# EAGLE board BeagleBone_Blue (EAGLE 7.3.0), part 1 of 3
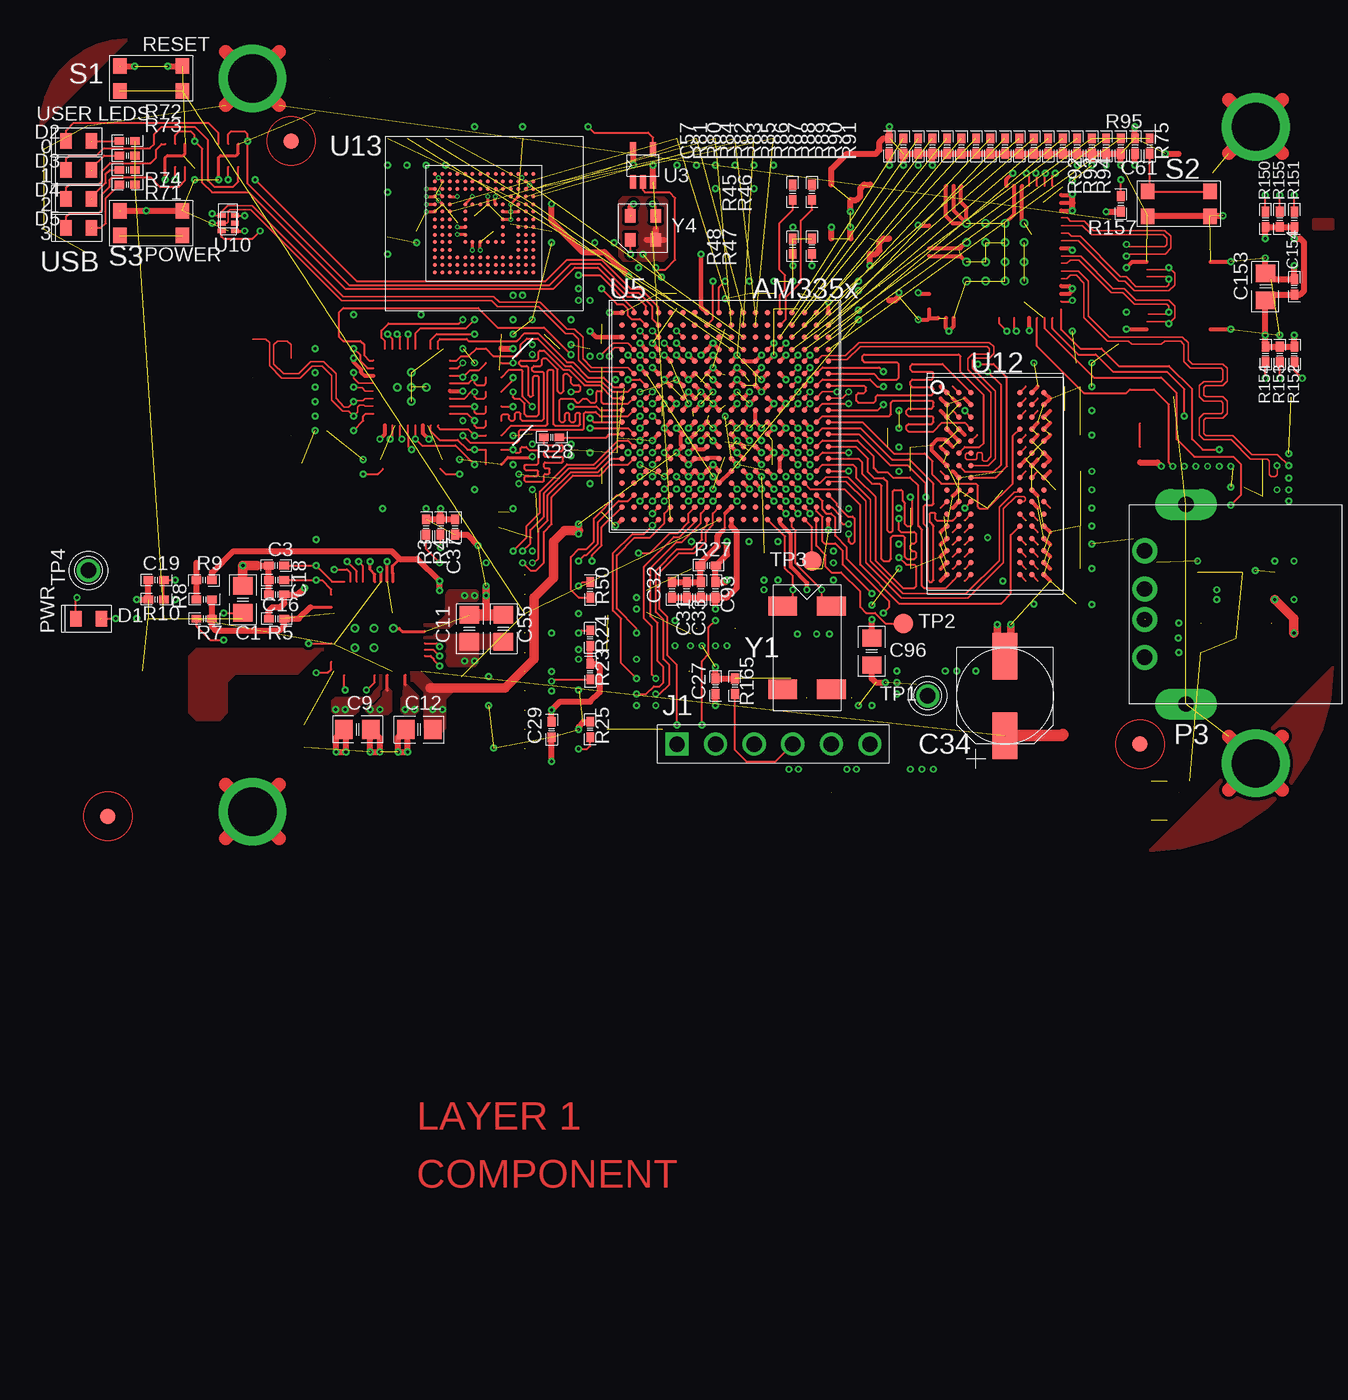
[diagram p0: board, top side]
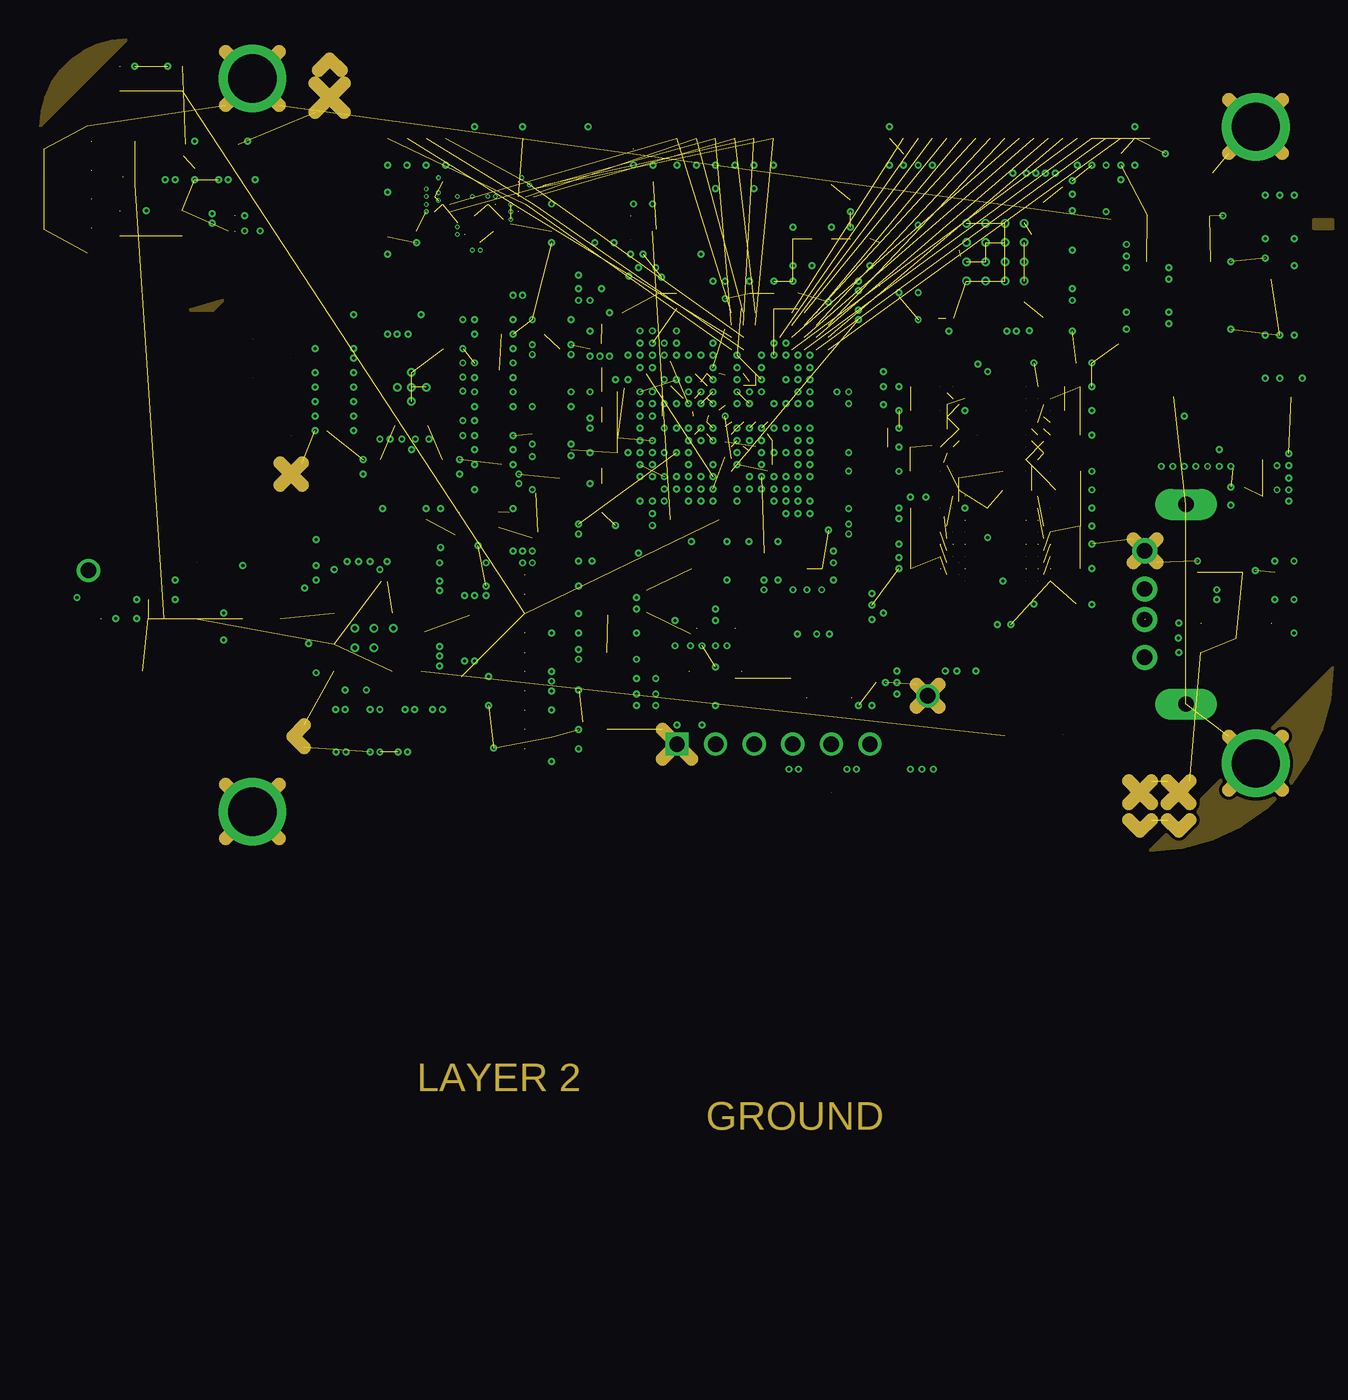
[diagram p1: board, inner layer Route2]
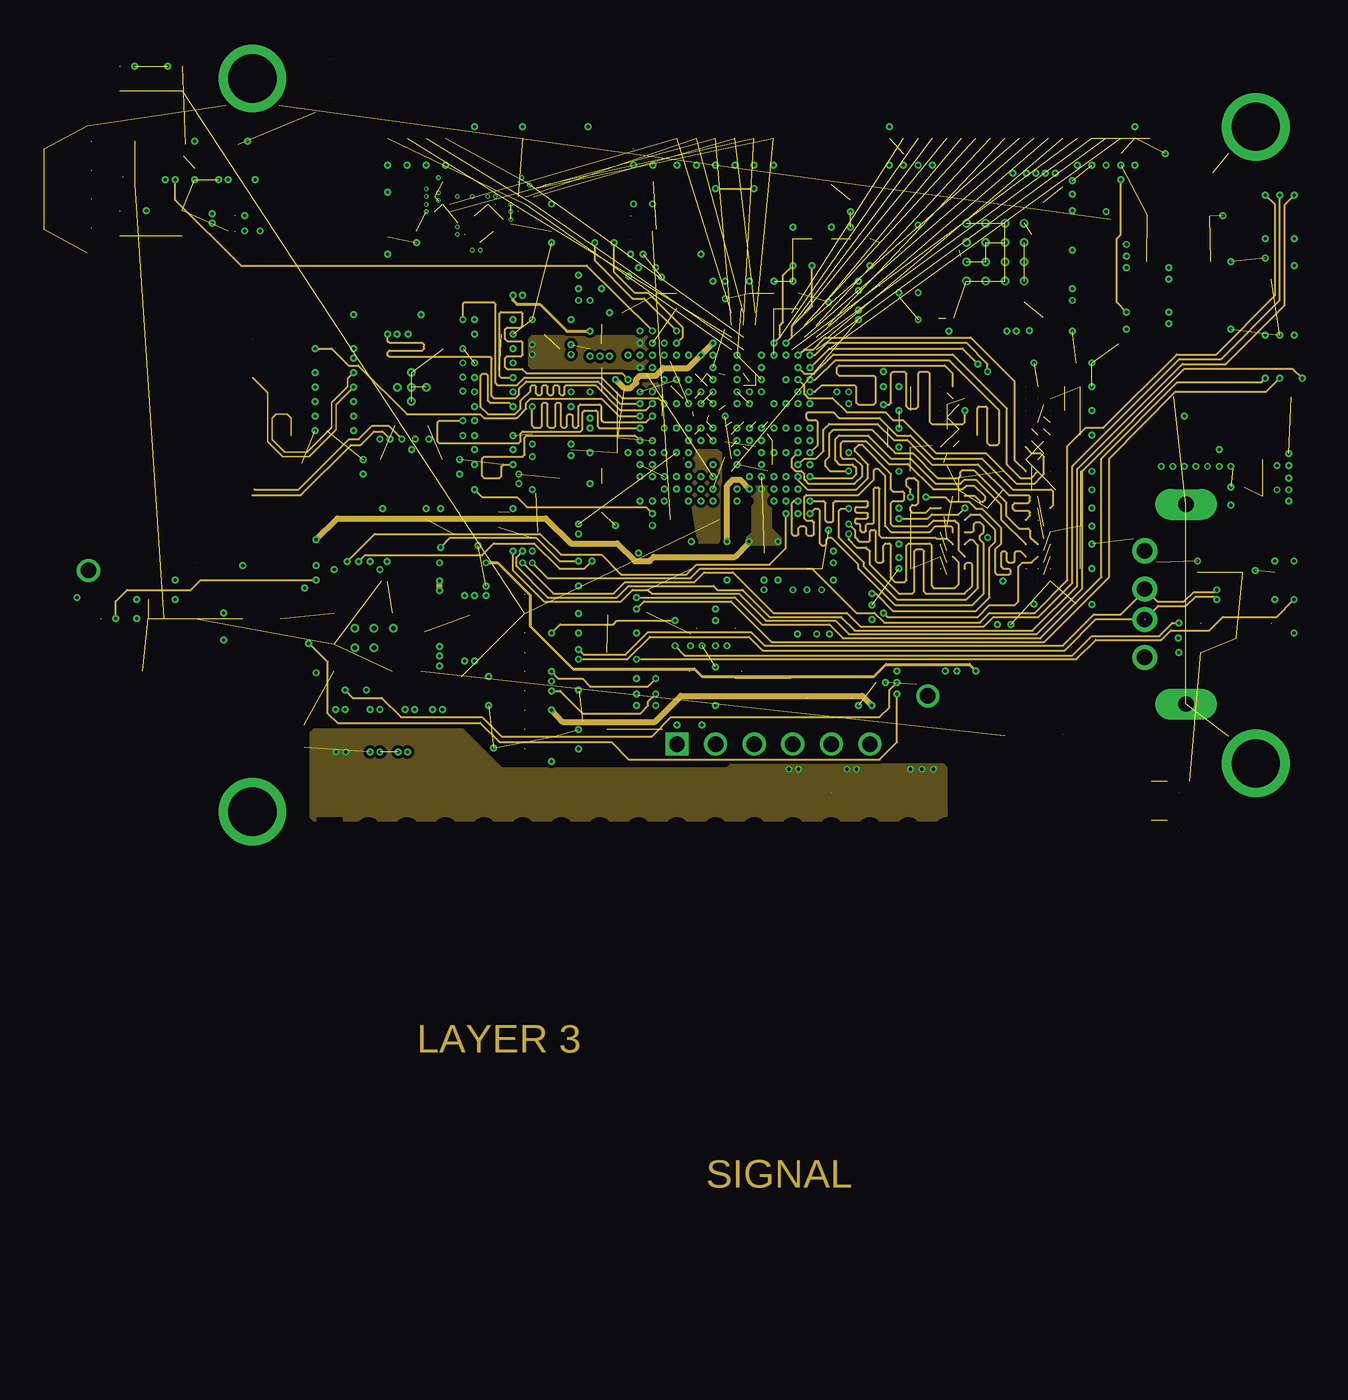
[diagram p2: board, inner layer Route3]
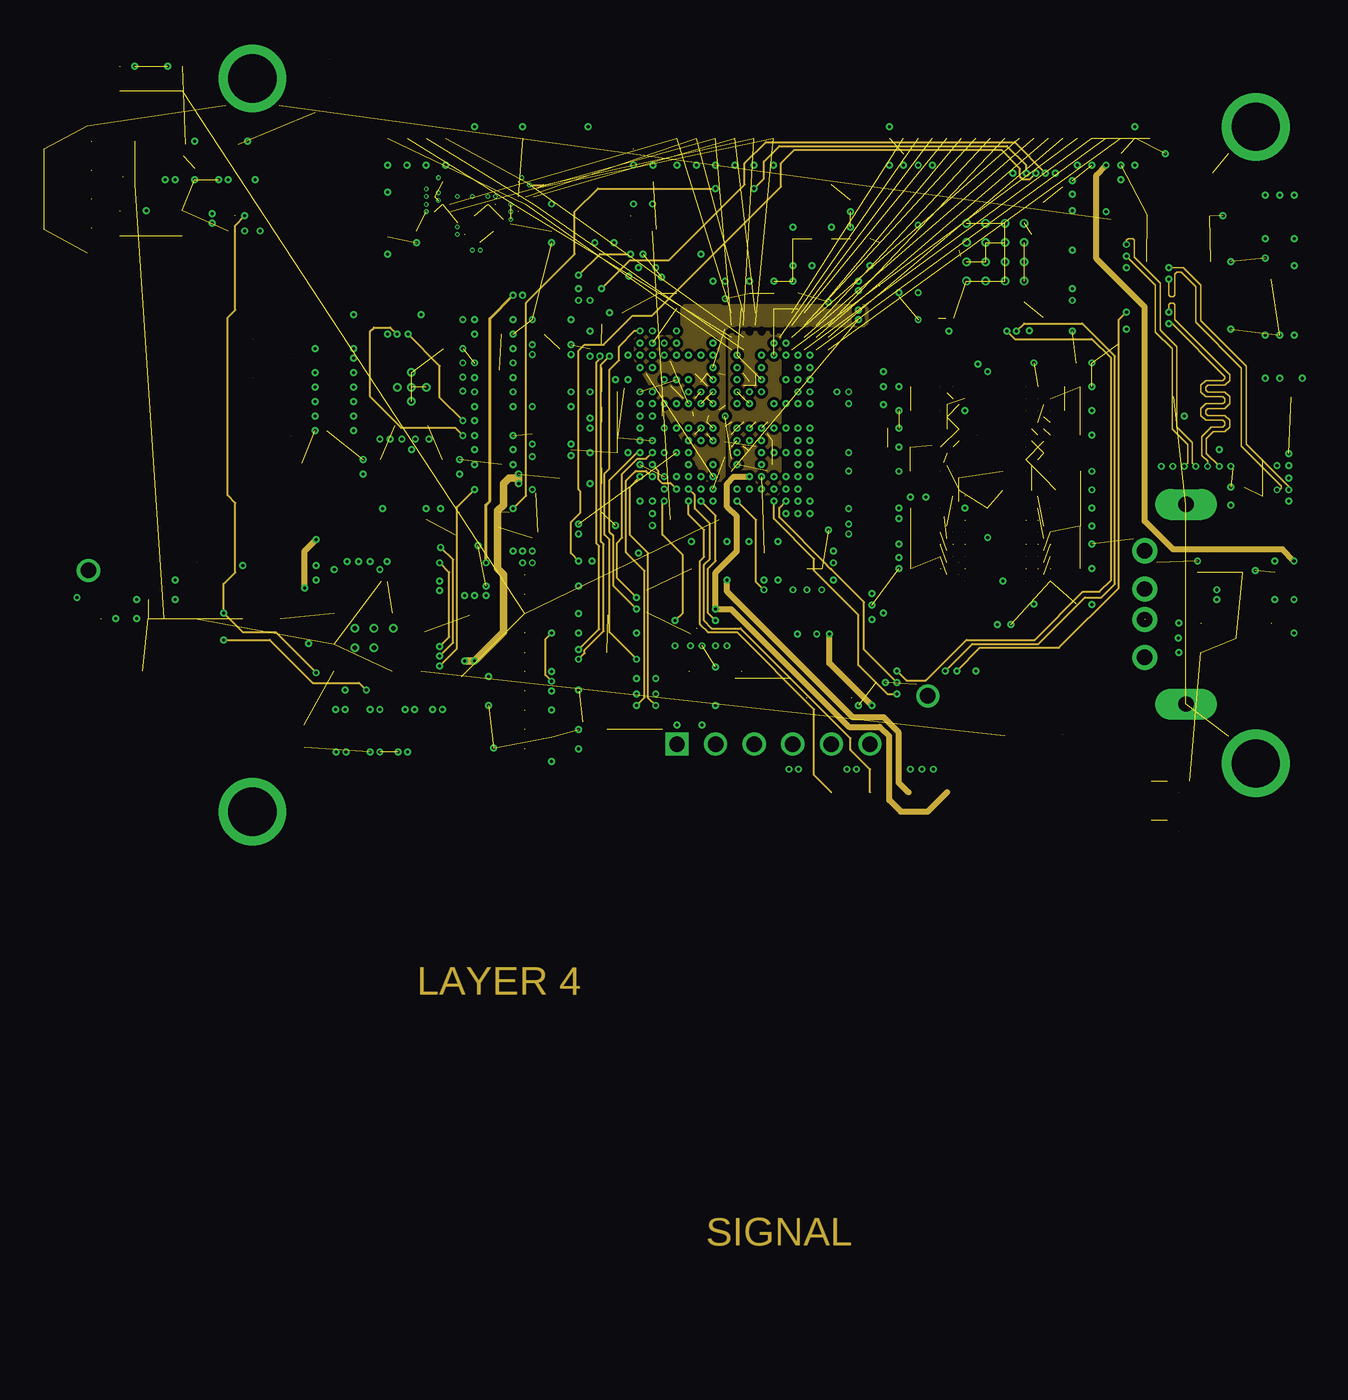
[diagram p3: board, inner layer Route4]
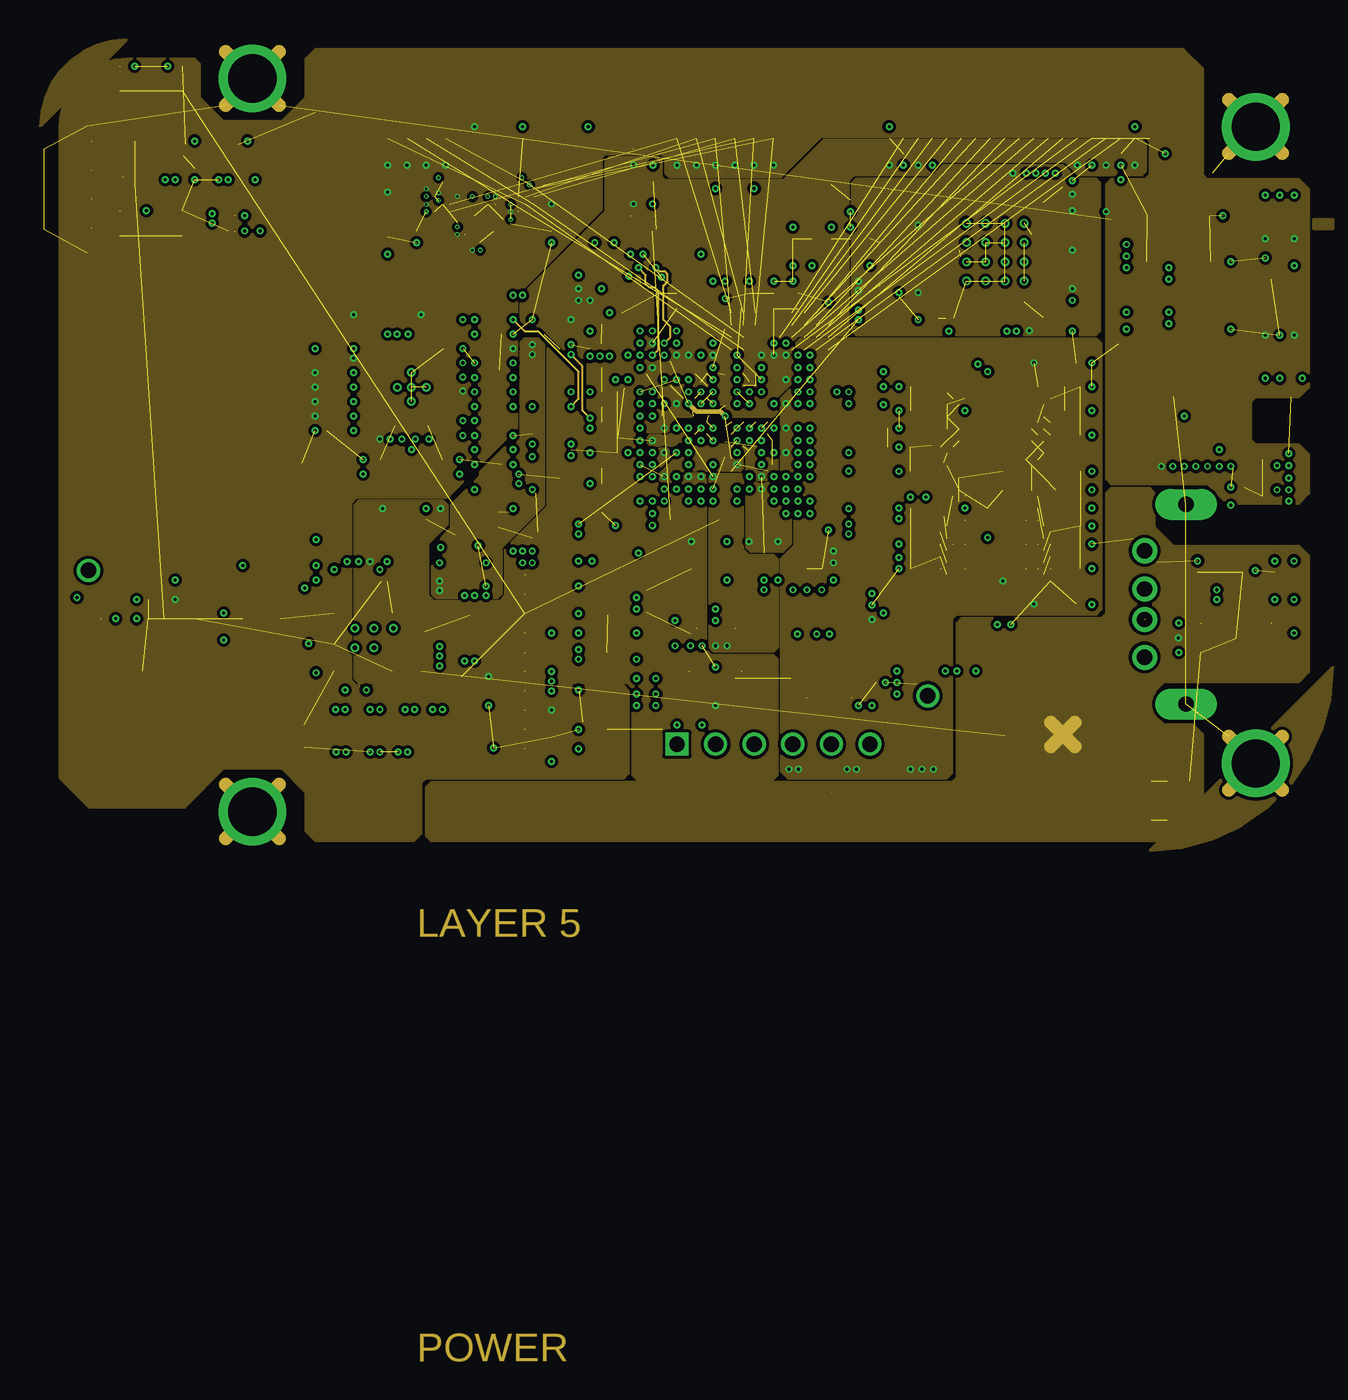
[diagram p4: board, inner layer Route5]
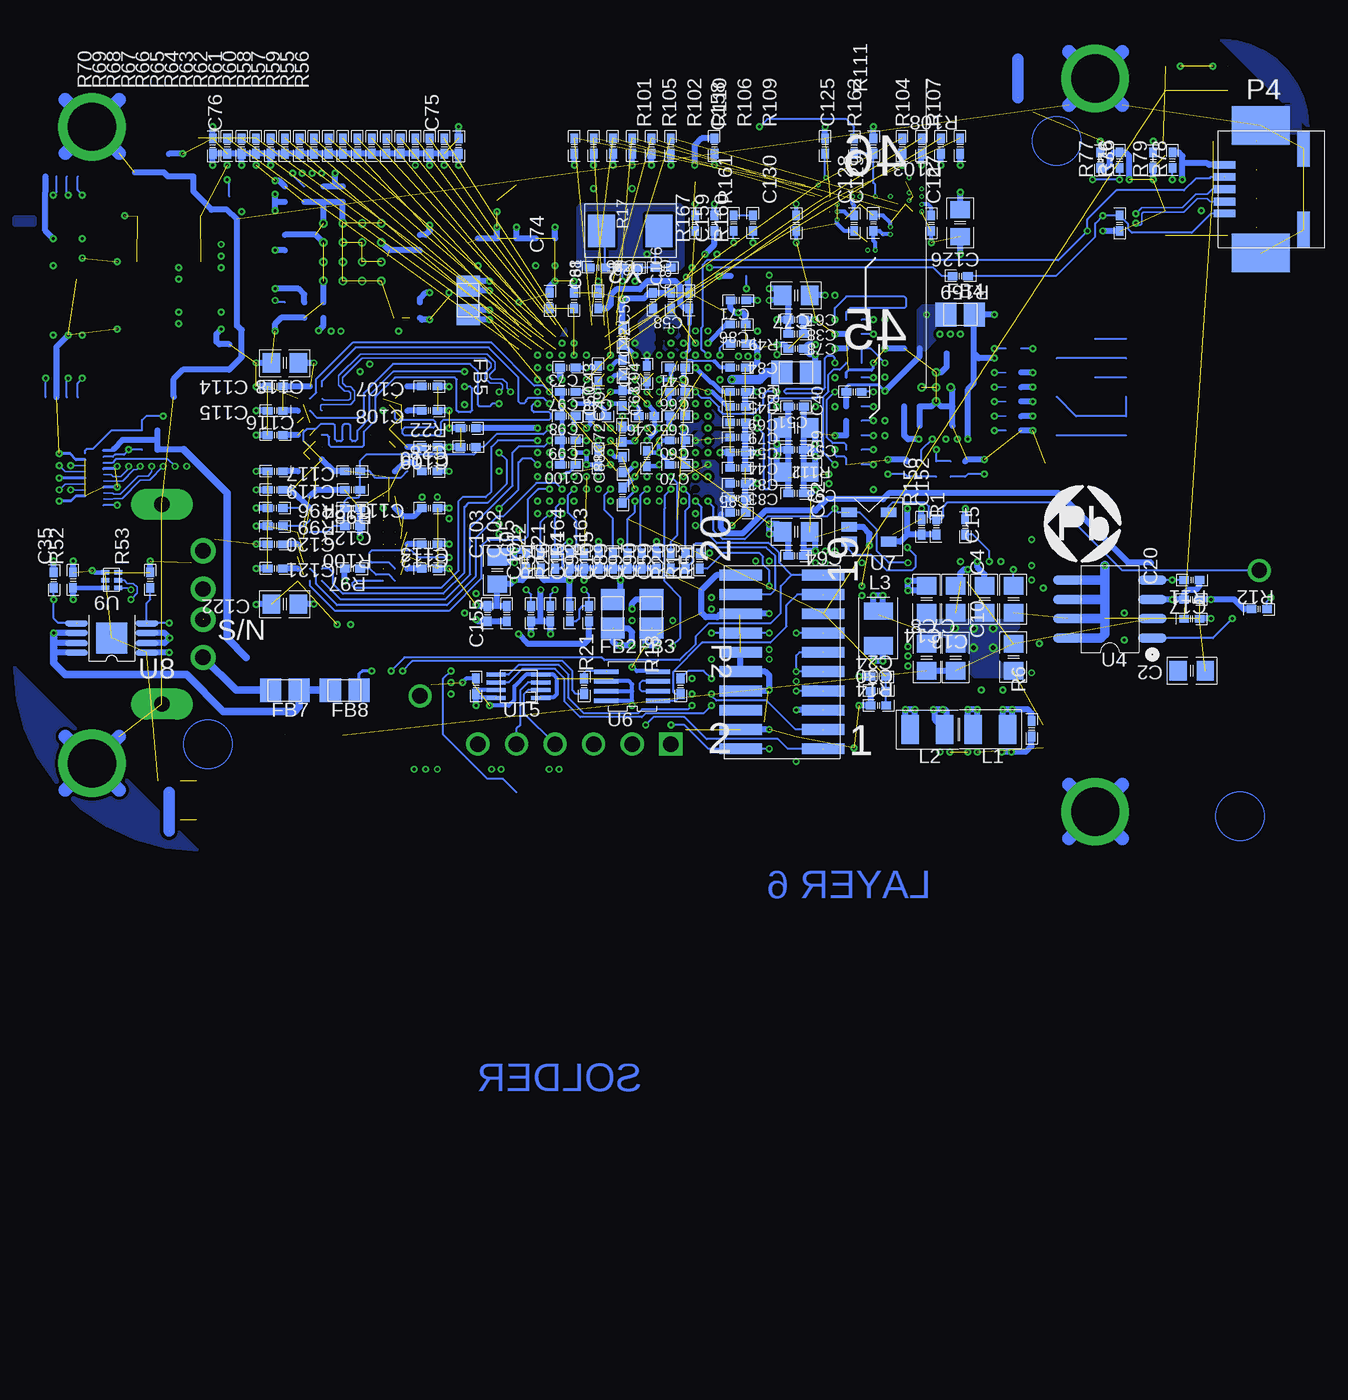
[diagram p5: board, bottom side, seen from below]

No outline drawn. Coordinates in mm, seen from the top.
Copper layers (1*16): Top 0.035mm / dielectric 1.5mm / Bottom 0.035mm
Design rules "BeagleBone_Black_RevB4": minimum track width 10mil, minimum drill 24mil, track to track 8mil, track to pad 8mil, pad to pad 8mil, via to via 8mil, smd to smd 8mil, copper to edge 40mil, drill to drill 8mil, minimum pad ring 0mil, minimum via ring 0mil, stop-mask expansion 4mil, vias tented up to drill 0mil, thermal gap 10mil

## Footprints (pad centres in the part's own frame; a part is rotated, then mirrored left to right if it is on the bottom)
805_1PRIMARY = smd 1.143 x 1.27: 1 -0.889,0; 2 0.889,0
402_2PRIMARY = smd 0.635 x 0.508: 1 -0.508,0; 2 0.508,0
805_2PRIMARY = smd 1.143 x 1.27: 1 -0.889,0; 2 0.889,0
402_1PRIMARY = smd 0.635 x 0.508: 1 -0.508,0; 2 0.508,0
RD205SMD_250D_1PRIMARY = smd 3.048 x 1.651: 1 -2.616,0; 2 2.616,0
LED_0603_1PRIMARY = smd 0.762 x 1.016: 1 -0.838,0; 2 0.838,0
P:EX40Y40D01 = smd 1.016 x 1.016: 0 0,0
SM-7351-IND-0805_1PRIMARY = smd 1.397 x 1.549: 1 0.94,0; 2 -0.94,0
SIP6_1PRIMARY = drill 1.016 pad 1.524 square: 1 0,6.35 | drill 1.016 pad 1.524: 2 0,3.81; 3 0,1.27; 4 0,-1.27; 5 0,-3.81; 6 0,-6.35
2520_1PRIMARY = smd 1.143 x 1.905: 1 1.143,0; 2 -1.143,0
MTGH200C125D_PL_1PRIMARY = drill 3.175 pad 4.445: 1 -0.406,0
HEADER10X2_SMD_1PRIMARY = smd 0.711 x 2.794: 1 5.715,2.718; 2 5.715,-2.718; 3 4.445,2.718; 4 4.445,-2.718; 5 3.175,2.718; 6 3.175,-2.718; 7 1.905,2.718; 8 1.905,-2.718; 9 0.635,2.718; 10 0.635,-2.718; 11 -0.635,2.718; 12 -0.635,-2.718; 13 -1.905,2.718; 14 -1.905,-2.718; 15 -3.175,2.718; 16 -3.175,-2.718; 17 -4.445,2.718; 18 -4.445,-2.718; 19 -5.715,2.718; 20 -5.715,-2.718
USB_A_SH_1PRIMARY = drill 1.016 pad 1.651: 1 -3.48,5.994; 2 -0.991,5.994; 3 1.016,5.994; 4 3.531,5.994 | drill 1.016 pad 2.032 long: 5 -6.553,3.277; 6 6.579,3.277
USB5MINI_4SHIELDED_SMD-5_1PRIMARY = smd 1.397 x 0.508: 1 -2.997,-1.6; 2 -2.997,-0.813; 3 -2.997,0; 4 -2.997,0.813; 5 -2.997,1.6 | smd 3.81 x 2.54: 6 -0.61,-4.191; 7 -0.61,4.191 | smd 0.813 x 2.362: 8 2.21,-2.667; 9 2.21,2.667
SW4SMD_63X161LS_1PRIMARY = smd 0.889 x 1.016: 1 -2.057,-0.813; 2 -2.057,0.813; 3 2.057,-0.813; 4 2.057,0.813
TP1-8040_1PRIMARY = drill 1.016 pad 1.524: 1 0,0
TP60C_SMD_1PRIMARY = smd 1.27 x 1.27: 1 0,0
DCK5_2P15X1P4_1PRIMARY = smd 0.406 x 0.889: 1 -0.66,-1.092; 2 0,-1.092; 3 0.66,-1.092; 4 0.66,1.092; 5 -0.66,1.092
SO8-25X75_1PRIMARY = smd 0.635 x 1.905: 1 1.905,2.794; 2 0.635,2.794; 3 -0.635,2.794; 4 -1.905,2.794; 5 -1.905,-2.794; 6 -0.635,-2.794; 7 0.635,-2.794; 8 1.905,-2.794
AM33XX_15X15_1PRIMARY = smd 0.356 x 0.356: 1 -6.807,6.807; 2 -5.994,6.807; 3 -5.207,6.807; 4 -4.394,6.807; 5 -3.607,6.807; 6 -2.794,6.807; 7 -2.007,6.807; 8 -1.194,6.807; 9 -0.406,6.807; 10 0.406,6.807; 11 1.194,6.807; 12 2.007,6.807; 13 2.794,6.807; 14 3.607,6.807; 15 4.394,6.807; 16 5.207,6.807; 17 5.994,6.807; 18 6.807,6.807; 19 -6.807,5.994; 20 -5.994,5.994; 21 -5.207,5.994; 22 -4.394,5.994; 23 -3.607,5.994; 24 -2.794,5.994; 25 -2.007,5.994; 26 -1.194,5.994; 27 -0.406,5.994; 28 0.406,5.994; 29 1.194,5.994; 30 2.007,5.994; 31 2.794,5.994; 32 3.607,5.994; 33 4.394,5.994; 34 5.207,5.994; 35 5.994,5.994; 36 6.807,5.994; 37 -6.807,5.207; 38 -5.994,5.207; 39 -5.207,5.207; 40 -4.394,5.207; 41 -3.607,5.207; 42 -2.794,5.207; 43 -2.007,5.207; 44 -1.194,5.207; 45 -0.406,5.207; 46 0.406,5.207; 47 1.194,5.207; 48 2.007,5.207; 49 2.794,5.207; 50 3.607,5.207; 51 4.394,5.207; 52 5.207,5.207; 53 5.994,5.207; 54 6.807,5.207; 55 -6.807,4.394; 56 -5.994,4.394; 57 -5.207,4.394; 58 -4.394,4.394; 59 -3.607,4.394; 60 -2.794,4.394; 61 -2.007,4.394; 62 -1.194,4.394; 63 -0.406,4.394; 64 0.406,4.394; 65 1.194,4.394; 66 2.007,4.394; 67 2.794,4.394; 68 3.607,4.394; 69 4.394,4.394; 70 5.207,4.394; 71 5.994,4.394; 72 6.807,4.394; 73 -6.807,3.607; 74 -5.994,3.607; 75 -5.207,3.607; 76 -4.394,3.607; 77 -3.607,3.607; 78 -2.794,3.607; 79 -2.007,3.607; 80 -1.194,3.607; 81 -0.406,3.607; 82 0.406,3.607; 83 1.194,3.607; 84 2.007,3.607; 85 2.794,3.607; 86 3.607,3.607; 87 4.394,3.607; 88 5.207,3.607; 89 5.994,3.607; 90 6.807,3.607; 91 -6.807,2.794; 92 -5.994,2.794; 93 -5.207,2.794; 94 -4.394,2.794; 95 -3.607,2.794; 96 -2.794,2.794; 97 -2.007,2.794; 98 -1.194,2.794; 99 -0.406,2.794; 100 0.406,2.794; 101 1.194,2.794; 102 2.007,2.794; 103 2.794,2.794; 104 3.607,2.794; 105 4.394,2.794; 106 5.207,2.794; 107 5.994,2.794; 108 6.807,2.794; 109 -6.807,2.007; 110 -5.994,2.007; 111 -5.207,2.007; 112 -4.394,2.007; 113 -3.607,2.007; 114 -2.794,2.007; 115 -2.007,2.007; 116 -1.194,2.007; 117 -0.406,2.007; 118 0.406,2.007; 119 1.194,2.007; 120 2.007,2.007; 121 2.794,2.007; 122 3.607,2.007; 123 4.394,2.007; 124 5.207,2.007; 125 5.994,2.007; 126 6.807,2.007; 127 -6.807,1.194; 128 -5.994,1.194; 129 -5.207,1.194; 130 -4.394,1.194; 131 -3.607,1.194; 132 -2.794,1.194; 133 -2.007,1.194; 134 -1.194,1.194; 135 -0.406,1.194; 136 0.406,1.194; 137 1.194,1.194; 138 2.007,1.194; 139 2.794,1.194; 140 3.607,1.194; 141 4.394,1.194; 142 5.207,1.194; 143 5.994,1.194; 144 6.807,1.194; 145 -6.807,0.406; 146 -5.994,0.406; 147 -5.207,0.406; 148 -4.394,0.406; 149 -3.607,0.406; 150 -2.794,0.406; 151 -2.007,0.406; 152 -1.194,0.406; 153 -0.406,0.406; 154 0.406,0.406; 155 1.194,0.406; 156 2.007,0.406; 157 2.794,0.406; 158 3.607,0.406; 159 4.394,0.406; 160 5.207,0.406; 161 5.994,0.406; 162 6.807,0.406; 163 -6.807,-0.406; 164 -5.994,-0.406; 165 -5.207,-0.406; 166 -4.394,-0.406; 167 -3.607,-0.406; 168 -2.794,-0.406; 169 -2.007,-0.406; 170 -1.194,-0.406; 171 -0.406,-0.406; 172 0.406,-0.406; 173 1.194,-0.406; 174 2.007,-0.406; 175 2.794,-0.406; 176 3.607,-0.406; 177 4.394,-0.406; 178 5.207,-0.406; 179 5.994,-0.406; 180 6.807,-0.406; 181 -6.807,-1.194; 182 -5.994,-1.194; 183 -5.207,-1.194; 184 -4.394,-1.194; 185 -3.607,-1.194; 186 -2.794,-1.194; 187 -2.007,-1.194; 188 -1.194,-1.194; 189 -0.406,-1.194; 190 0.406,-1.194; 191 1.194,-1.194; 192 2.007,-1.194; 193 2.794,-1.194; 194 3.607,-1.194; 195 4.394,-1.194; 196 5.207,-1.194; 197 5.994,-1.194; 198 6.807,-1.194; 199 -6.807,-2.007; 200 -5.994,-2.007; 201 -5.207,-2.007; 202 -4.394,-2.007; 203 -3.607,-2.007; 204 -2.794,-2.007; 205 -2.007,-2.007; 206 -1.194,-2.007; 207 -0.406,-2.007; 208 0.406,-2.007; 209 1.194,-2.007; 210 2.007,-2.007; 211 2.794,-2.007; 212 3.607,-2.007; 213 4.394,-2.007; 214 5.207,-2.007; 215 5.994,-2.007; 216 6.807,-2.007; 217 -6.807,-2.794; 218 -5.994,-2.794; 219 -5.207,-2.794; 220 -4.394,-2.794; 221 -3.607,-2.794; 222 -2.794,-2.794; 223 -2.007,-2.794; 224 -1.194,-2.794; 225 -0.406,-2.794; 226 0.406,-2.794; 227 1.194,-2.794; 228 2.007,-2.794; 229 2.794,-2.794; 230 3.607,-2.794; 231 4.394,-2.794; 232 5.207,-2.794; 233 5.994,-2.794; 234 6.807,-2.794; 235 -6.807,-3.607; 236 -5.994,-3.607; 237 -5.207,-3.607; 238 -4.394,-3.607; 239 -3.607,-3.607; 240 -2.794,-3.607; 241 -2.007,-3.607; 242 -1.194,-3.607; 243 -0.406,-3.607; 244 0.406,-3.607; 245 1.194,-3.607; 246 2.007,-3.607; 247 2.794,-3.607; 248 3.607,-3.607; 249 4.394,-3.607; 250 5.207,-3.607; 251 5.994,-3.607; 252 6.807,-3.607; 253 -6.807,-4.394; 254 -5.994,-4.394; 255 -5.207,-4.394; 256 -4.394,-4.394; 257 -3.607,-4.394; 258 -2.794,-4.394; 259 -2.007,-4.394; 260 -1.194,-4.394; 261 -0.406,-4.394; 262 0.406,-4.394; 263 1.194,-4.394; 264 2.007,-4.394; 265 2.794,-4.394; 266 3.607,-4.394; 267 4.394,-4.394; 268 5.207,-4.394; 269 5.994,-4.394; 270 6.807,-4.394; 271 -6.807,-5.207; 272 -5.994,-5.207; 273 -5.207,-5.207; 274 -4.394,-5.207; 275 -3.607,-5.207; 276 -2.794,-5.207; 277 -2.007,-5.207; 278 -1.194,-5.207; 279 -0.406,-5.207; 280 0.406,-5.207; 281 1.194,-5.207; 282 2.007,-5.207; 283 2.794,-5.207; 284 3.607,-5.207; 285 4.394,-5.207; 286 5.207,-5.207; 287 5.994,-5.207; 288 6.807,-5.207; 289 -6.807,-5.994; 290 -5.994,-5.994; 291 -5.207,-5.994; 292 -4.394,-5.994; 293 -3.607,-5.994; 294 -2.794,-5.994; 295 -2.007,-5.994; 296 -1.194,-5.994; 297 -0.406,-5.994; 298 0.406,-5.994; 299 1.194,-5.994; 300 2.007,-5.994; 301 2.794,-5.994; 302 3.607,-5.994; 303 4.394,-5.994; 304 5.207,-5.994; 305 5.994,-5.994; 306 6.807,-5.994; 307 -6.807,-6.807; 308 -5.994,-6.807; 309 -5.207,-6.807; 310 -4.394,-6.807; 311 -3.607,-6.807; 312 -2.794,-6.807; 313 -2.007,-6.807; 314 -1.194,-6.807; 315 -0.406,-6.807; 316 0.406,-6.807; 317 1.194,-6.807; 318 2.007,-6.807; 319 2.794,-6.807; 320 3.607,-6.807; 321 4.394,-6.807; 322 5.207,-6.807; 323 5.994,-6.807; 324 6.807,-6.807
SOP8_DCT_1PRIMARY = smd 0.305 x 1.6: 1 0.965,1.702; 2 0.33,1.702; 3 -0.33,1.702; 4 -0.965,1.702; 5 -0.965,-1.702; 6 -0.33,-1.702; 7 0.33,-1.702; 8 0.965,-1.702
SOT23-5_1PRIMARY = smd 0.635 x 1.016: 1 0.965,1.295; 2 0,1.295; 3 -0.965,1.295; 4 -0.965,-1.295; 5 0.965,-1.295
DGN-16X60_1PRIMARY = smd 0.406 x 1.524: 1 0.965,2.311; 2 0.33,2.311; 3 -0.33,2.311; 4 -0.965,2.311; 5 -0.965,-2.311; 6 -0.33,-2.311; 7 0.33,-2.311; 8 0.965,-2.311 | smd 2.032 x 2.032: 9 0,0
U_6_DRY_1PRIMARY = smd 0.305 x 0.508: 1 -0.508,-0.432; 2 0,-0.432; 3 0.508,-0.432; 4 0.508,0.432; 5 0,0.432; 6 -0.508,0.432
BGA96_T9_P8_9X14_1PRIMARY = smd 0.356 x 0.356: 1 -3.2,5.994; 2 -2.413,5.994; 3 -1.6,5.994; 4 1.6,5.994; 5 2.413,5.994; 6 3.2,5.994; 7 -3.2,5.207; 8 -2.413,5.207; 9 -1.6,5.207; 10 1.6,5.207; 11 2.413,5.207; 12 3.2,5.207; 13 -3.2,4.394; 14 -2.413,4.394; 15 -1.6,4.394; 16 1.6,4.394; 17 2.413,4.394; 18 3.2,4.394; 19 -3.2,3.607; 20 -2.413,3.607; 21 -1.6,3.607; 22 1.6,3.607; 23 2.413,3.607; 24 3.2,3.607; 25 -3.2,2.794; 26 -2.413,2.794; 27 -1.6,2.794; 28 1.6,2.794; 29 2.413,2.794; 30 3.2,2.794; 31 -3.2,2.007; 32 -2.413,2.007; 33 -1.6,2.007; 34 1.6,2.007; 35 2.413,2.007; 36 3.2,2.007; 37 -3.2,1.194; 38 -2.413,1.194; 39 -1.6,1.194; 40 1.6,1.194; 41 2.413,1.194; 42 3.2,1.194; 43 -3.2,0.406; 44 -2.413,0.406; 45 -1.6,0.406; 46 1.6,0.406; 47 2.413,0.406; 48 3.2,0.406; 49 -3.2,-0.406; 50 -2.413,-0.406; 51 -1.6,-0.406; 52 1.6,-0.406; 53 2.413,-0.406; 54 3.2,-0.406; 55 -3.2,-1.194; 56 -2.413,-1.194; 57 -1.6,-1.194; 58 1.6,-1.194; 59 2.413,-1.194; 60 3.2,-1.194; 61 -3.2,-2.007; 62 -2.413,-2.007; 63 -1.6,-2.007; 64 1.6,-2.007; 65 2.413,-2.007; 66 3.2,-2.007; 67 -3.2,-2.794; 68 -2.413,-2.794; 69 -1.6,-2.794; 70 1.6,-2.794; 71 2.413,-2.794; 72 3.2,-2.794; 73 -3.2,-3.607; 74 -2.413,-3.607; 75 -1.6,-3.607; 76 1.6,-3.607; 77 2.413,-3.607; 78 3.2,-3.607; 79 -3.2,-4.394; 80 -2.413,-4.394; 81 -1.6,-4.394; 82 1.6,-4.394; 83 2.413,-4.394; 84 3.2,-4.394; 85 -3.2,-5.207; 86 -2.413,-5.207; 87 -1.6,-5.207; 88 1.6,-5.207; 89 2.413,-5.207; 90 3.2,-5.207; 91 -3.2,-5.994; 92 -2.413,-5.994; 93 -1.6,-5.994; 94 1.6,-5.994; 95 2.413,-5.994; 96 3.2,-5.994
BGA153_P14_P5_11P5X13_1PRIMARY = smd 0.254 x 0.254: 1 -3.251,3.251; 2 -2.743,3.251; 3 -2.261,3.251; 4 -1.753,3.251; 5 -1.245,3.251; 6 -0.762,3.251; 7 -0.254,3.251; 8 0.254,3.251; 9 0.762,3.251; 10 1.245,3.251; 11 1.753,3.251; 12 2.261,3.251; 13 2.743,3.251; 14 3.251,3.251; 15 -3.251,2.743; 16 -2.743,2.743; 17 -2.261,2.743; 18 -1.753,2.743; 19 -1.245,2.743; 20 -0.762,2.743; 21 -0.254,2.743; 22 0.254,2.743; 23 0.762,2.743; 24 1.245,2.743; 25 1.753,2.743; 26 2.261,2.743; 27 2.743,2.743; 28 3.251,2.743; 29 -3.251,2.261; 30 -2.743,2.261; 31 -2.261,2.261; 32 -1.753,2.261; 33 -1.245,2.261; 34 -0.762,2.261; 35 -0.254,2.261; 36 0.254,2.261; 37 0.762,2.261; 38 1.245,2.261; 39 1.753,2.261; 40 2.261,2.261; 41 2.743,2.261; 42 3.251,2.261; 43 -3.251,1.753; 44 -2.743,1.753; 45 -2.261,1.753; 46 -1.753,1.753; 47 2.261,1.753; 48 2.743,1.753; 49 3.251,1.753; 50 -3.251,1.245; 51 -2.743,1.245; 52 -2.261,1.245; 53 -1.245,1.245; 54 -0.762,1.245; 55 -0.254,1.245; 56 0.254,1.245; 57 0.762,1.245; 58 1.245,1.245; 59 2.261,1.245; 60 2.743,1.245; 61 3.251,1.245; 62 -3.251,0.762; 63 -2.743,0.762; 64 -2.261,0.762; 65 -1.245,0.762; 66 1.245,0.762; 67 2.261,0.762; 68 2.743,0.762; 69 3.251,0.762; 70 -3.251,0.254; 71 -2.743,0.254; 72 -2.261,0.254; 73 -1.245,0.254; 74 1.245,0.254; 75 2.261,0.254; 76 2.743,0.254; 77 3.251,0.254; 78 -3.251,-0.254; 79 -2.743,-0.254; 80 -2.261,-0.254; 81 -1.245,-0.254; 82 1.245,-0.254; 83 2.261,-0.254; 84 2.743,-0.254; 85 3.251,-0.254; 86 -3.251,-0.762; 87 -2.743,-0.762; 88 -2.261,-0.762; 89 -1.245,-0.762; 90 1.245,-0.762; 91 2.261,-0.762; 92 2.743,-0.762; 93 3.251,-0.762; 94 -3.251,-1.245; 95 -2.743,-1.245; 96 -2.261,-1.245; 97 -1.245,-1.245; 98 -0.762,-1.245; 99 -0.254,-1.245; 100 0.254,-1.245; 101 0.762,-1.245; 102 1.245,-1.245; 103 2.261,-1.245; 104 2.743,-1.245; 105 3.251,-1.245; 106 -3.251,-1.753; 107 -2.743,-1.753; 108 -2.261,-1.753; 109 2.261,-1.753; 110 2.743,-1.753; 111 3.251,-1.753; 112 -3.251,-2.261; 113 -2.743,-2.261; 114 -2.261,-2.261; 115 -1.753,-2.261; 116 -1.245,-2.261; 117 -0.762,-2.261; 118 -0.254,-2.261; 119 0.254,-2.261; 120 0.762,-2.261; 121 1.245,-2.261; 122 1.753,-2.261; 123 2.261,-2.261; 124 2.743,-2.261; 125 3.251,-2.261; 126 -3.251,-2.743; 127 -2.743,-2.743; 128 -2.261,-2.743; 129 -1.753,-2.743; 130 -1.245,-2.743; 131 -0.762,-2.743; 132 -0.254,-2.743; 133 0.254,-2.743; 134 0.762,-2.743; 135 1.245,-2.743; 136 1.753,-2.743; 137 2.261,-2.743; 138 2.743,-2.743; 139 3.251,-2.743; 140 -3.251,-3.251; 141 -2.743,-3.251; 142 -2.261,-3.251; 143 -1.753,-3.251; 144 -1.245,-3.251; 145 -0.762,-3.251; 146 -0.254,-3.251; 147 0.254,-3.251; 148 0.762,-3.251; 149 1.245,-3.251; 150 1.753,-3.251; 151 2.261,-3.251; 152 2.743,-3.251; 153 3.251,-3.251
U_8_DCU_1PRIMARY = smd 0.254 x 1.27: 1 0.762,1.473; 2 0.254,1.473; 3 -0.254,1.473; 4 -0.762,1.473; 5 -0.762,-1.473; 6 -0.254,-1.473; 7 0.254,-1.473; 8 0.762,-1.473
XTAL4_126-216SMD_1PRIMARY = smd 1.27 x 1.905: 1 -2.743,-1.6; 2 2.743,-1.6; 3 2.743,1.6; 4 -2.743,1.6
XTAL150SMD_125X196_1PRIMARY = smd 1.778 x 2.159: 1 -1.905,0; 2 1.905,0
OSC4_61X65LS_79X98SMD_1PRIMARY = smd 0.711 x 0.889: 1 -0.838,-0.787; 2 0.838,-0.787; 3 0.838,0.787; 4 -0.838,0.787

## Placement (x,y rotation side)
C1  10uF,_10V  [805_1PRIMARY]  22.1,23.42 270 top
C2  10uF,_10V  [805_1PRIMARY]  16.38,18.72 180 bottom
C3  0.1uf,_6V3  [402_2PRIMARY]  24.31,25.65 0 top
C4  10uF,_10V  [805_2PRIMARY]  28.12,23.42 90 bottom
C7  10uF,_10V  [805_1PRIMARY]  31.93,19.61 270 bottom
C8  10uF,_10V  [805_1PRIMARY]  33.83,19.61 270 bottom
C9  10uF,_10V  [805_1PRIMARY]  29.64,14.86 180 top
C10  10uF,_10V  [805_2PRIMARY]  28.12,19.61 90 bottom
C11  10uF,_10V  [805_1PRIMARY]  37.01,21.51 270 top
C12  10uF,_10V  [805_1PRIMARY]  33.71,14.86 0 top
C13  10uF,_10V  [805_2PRIMARY]  31.93,23.42 90 bottom
C14  10uF,_10V  [805_2PRIMARY]  33.83,23.42 90 bottom
C15  10uF,_10V  [805_2PRIMARY]  30.02,23.42 90 bottom
C16  2.2uF,_6V3  [402_2PRIMARY]  24.31,23.75 180 top
C17  2.2uF,_6V3  [402_1PRIMARY]  16.38,22.15 0 bottom
C18  2.2uF,_6V3  [402_2PRIMARY]  24.31,24.69 180 top
C19  470pF,_50V  [402_2PRIMARY]  16.38,24.69 180 top
C20  0.1uf,_6V3  [402_1PRIMARY]  16.38,23.42 0 bottom
C21  18pF,_50V  [402_1PRIMARY]  58.6,22.48 90 bottom
C22  18pF,_50V  [402_1PRIMARY]  59.87,22.48 90 bottom
C24  1uF,_10V  [402_1PRIMARY]  37.01,17.4 180 bottom
C25  18pF,_50V  [402_1PRIMARY]  55.5,45.26 180 bottom
C26  18pF,_50V  [402_1PRIMARY]  51.18,45.26 0 bottom
C27  0.1uf,_6V3  [402_2PRIMARY]  53.21,17.7 90 top
C28  0.1uf,_6V3  [402_1PRIMARY]  64.01,33.45 180 bottom
C29  0.1uf,_6V3  [402_2PRIMARY]  42.42,14.86 270 top
C30  0.1uf,_6V3  [402_1PRIMARY]  37.01,16.43 180 bottom
C31  0.1uf,_6V3  [402_2PRIMARY]  51.31,24.05 270 top
C32  1nF,_50V  [402_2PRIMARY]  50.34,24.05 270 top
C33  0.1uf,_6V3  [402_2PRIMARY]  52.25,24.05 270 top
C34  100uF,_6V3  [RD205SMD_250D_1PRIMARY]  72.26,17.07 90 top
C35  0.1uf,_6V3  [402_1PRIMARY]  90.02,24.69 90 bottom
C36  0.1uf,_6V3  [402_2PRIMARY]  21.13,48.18 270 bottom
C37  0.1uf,_6V3  [402_2PRIMARY]  36.07,28.19 270 top
C38  0.1uf,_6V3  [402_1PRIMARY]  42.42,40.89 0 bottom
C39  10uF,_10V  [805_1PRIMARY]  42.42,31.8 180 bottom
C40  10uF,_10V  [805_1PRIMARY]  42.42,34.72 180 bottom
C41  0.1uf,_6V3  [402_1PRIMARY]  50.24,38.68 0 bottom
C42  0.1uf,_6V3  [402_2PRIMARY]  53.85,38.68 270 bottom
C43  0.1uf,_6V3  [402_1PRIMARY]  55.45,38.28 90 bottom
C44  0.1uf,_6V3  [402_1PRIMARY]  46.25,32.08 0 bottom
C45  0.1uf,_6V3  [402_1PRIMARY]  46.25,36.09 0 bottom
C46  0.1uf,_6V3  [402_1PRIMARY]  52.27,35.48 180 bottom
C47  0.1uf,_6V3  [402_2PRIMARY]  53.85,36.68 270 bottom
C48  0.1uf,_6V3  [402_1PRIMARY]  55.45,35.48 180 bottom
C49  0.1uf,_6V3  [402_1PRIMARY]  53.85,34.29 90 bottom
C50  0.1uf,_6V3  [402_1PRIMARY]  55.45,32.69 90 bottom
C51  0.1uf,_6V3  [402_1PRIMARY]  42.42,36.12 0 bottom
C52  0.1uf,_6V3  [402_1PRIMARY]  42.42,33.27 0 bottom
C53  0.1uf,_6V3  [402_1PRIMARY]  42.42,30.4 0 bottom
C54  0.1uf,_6V3  [402_1PRIMARY]  46.25,33.1 0 bottom
C55  10uF,_10V  [805_1PRIMARY]  39.24,21.51 270 top
C56  0.1uf,_6V3  [402_2PRIMARY]  53.85,40.69 270 bottom
C57  0.1uf,_6V3  [402_2PRIMARY]  64.64,53.26 270 top
C58  0.1uf,_6V3  [402_1PRIMARY]  50.65,43.08 90 bottom
C59  0.1uf,_6V3  [402_2PRIMARY]  51.61,25.96 270 bottom
C60  0.1uf,_6V3  [402_1PRIMARY]  50.24,33.88 0 bottom
C61  0.1uf,_6V3  [402_2PRIMARY]  80.82,53.26 270 top
C62  10uF,_10V  [805_1PRIMARY]  42.42,27.86 180 bottom
C63  0.1uf,_6V3  [402_1PRIMARY]  52.25,32.69 90 bottom
C64  0.1uf,_6V3  [402_1PRIMARY]  42.42,26.29 0 bottom
C65  0.1uf,_6V3  [402_1PRIMARY]  50.24,35.48 0 bottom
C66  0.1uf,_6V3  [402_1PRIMARY]  50.24,37.08 0 bottom
C67  0.1uf,_6V3  [402_1PRIMARY]  42.42,41.83 0 bottom
C68  0.1uf,_6V3  [402_2PRIMARY]  57.05,43.08 270 bottom
C69  0.1uf,_6V3  [402_1PRIMARY]  46.25,35.08 180 bottom
C70  0.1uf,_6V3  [402_1PRIMARY]  50.24,32.28 0 bottom
C71  0.1uf,_6V3  [402_1PRIMARY]  46.23,43.1 0 bottom
C72  0.1uf,_6V3  [402_2PRIMARY]  53.85,32.28 270 bottom
C73  0.1uf,_6V3  [402_1PRIMARY]  57.45,38.68 180 bottom
C74  0.1uf,_6V3  [402_2PRIMARY]  58.65,43.08 270 bottom
C75  0.1uf,_6V3  [402_2PRIMARY]  64.64,53.26 270 bottom
C76  0.1uf,_6V3  [402_2PRIMARY]  80.82,53.26 270 bottom
C77  10uF,_10V  [805_2PRIMARY]  42.42,43.43 0 bottom
C78  0.1uf,_6V3  [402_1PRIMARY]  42.42,39.93 180 bottom
C79  0.1uf,_6V3  [402_1PRIMARY]  46.25,34.09 0 bottom
C80  0.1uf,_6V3  [402_1PRIMARY]  49.45,43.08 90 bottom
C81  0.1uf,_6V3  [402_1PRIMARY]  55.45,43.08 90 bottom
C82  0.1uf,_6V3  [402_1PRIMARY]  46.25,31.04 0 bottom
C83  0.1uf,_6V3  [402_1PRIMARY]  46.25,30.07 0 bottom
C84  0.1uf,_6V3  [402_1PRIMARY]  46.25,38.68 0 bottom
C85  0.1uf,_6V3  [402_1PRIMARY]  46.25,29.13 0 bottom
C86  0.1uf,_6V3  [402_1PRIMARY]  46.25,41.53 0 bottom
C87  0.1uf,_6V3  [402_1PRIMARY]  46.25,37.08 0 bottom
C88  0.1uf,_6V3  [402_2PRIMARY]  53.85,30.28 270 bottom
C89  1uF,_10V  [402_2PRIMARY]  54.48,25.96 270 bottom
C90  1uF,_10V  [402_2PRIMARY]  52.58,25.96 270 bottom
C91  1uF,_10V  [402_2PRIMARY]  53.52,25.96 270 bottom
C92  0.1uf,_6V3  [402_2PRIMARY]  56.39,25.96 270 bottom
C93  0.1uf,_6V3  [402_2PRIMARY]  53.21,24.05 270 top
C94  0.1uf,_6V3  [402_2PRIMARY]  52.25,38.28 270 bottom
C95  10uF,_10V  [805_2PRIMARY]  62.1,25.32 90 bottom
C96  10uF,_10V  [805_1PRIMARY]  63.5,19.99 90 top
C97  0.1uf,_6V3  [402_1PRIMARY]  57.45,37.08 0 bottom
C98  0.1uf,_6V3  [402_1PRIMARY]  57.45,35.48 0 bottom
C99  0.1uf,_6V3  [402_1PRIMARY]  57.45,33.88 0 bottom
C100  0.1uf,_6V3  [402_1PRIMARY]  57.45,32.28 0 bottom
C101  0.1uf,_6V3  [402_2PRIMARY]  60.2,25.96 270 bottom
C102  0.1uf,_6V3  [402_1PRIMARY]  61.47,22.48 90 bottom
C103  0.1uf,_6V3  [402_1PRIMARY]  62.74,22.48 90 bottom
C104  1uF,_10V  [402_2PRIMARY]  57.33,25.96 270 bottom
C105  0.1uf,_6V3  [402_2PRIMARY]  55.42,25.96 270 bottom
C106  0.1uf,_6V3  [402_1PRIMARY]  51.84,43.08 90 bottom
C107  0.1uf,_6V3  [402_1PRIMARY]  66.55,37.44 0 bottom
C108  0.1uf,_6V3  [402_1PRIMARY]  66.55,35.84 0 bottom
C109  0.1uf,_6V3  [402_1PRIMARY]  66.55,33.45 0 bottom
C110  0.1uf,_6V3  [402_1PRIMARY]  66.55,31.85 0 bottom
C111  0.1uf,_6V3  [402_1PRIMARY]  66.55,29.44 0 bottom
C112  0.1uf,_6V3  [402_1PRIMARY]  66.55,27.05 0 bottom
C113  0.1uf,_6V3  [402_1PRIMARY]  66.55,25.45 0 bottom
C114  0.1uf,_6V3  [402_1PRIMARY]  76.71,37.44 180 bottom
C115  0.1uf,_6V3  [402_1PRIMARY]  76.71,35.84 180 bottom
C116  0.1uf,_6V3  [402_1PRIMARY]  76.71,34.24 180 bottom
C117  0.1uf,_6V3  [402_1PRIMARY]  76.71,31.85 180 bottom
C118  10uF,_10V  [805_2PRIMARY]  76.07,38.99 0 bottom
C119  0.1uf,_6V3  [402_1PRIMARY]  76.71,30.63 180 bottom
C120  0.1uf,_6V3  [402_1PRIMARY]  76.71,27.05 180 bottom
C121  0.1uf,_6V3  [402_1PRIMARY]  76.71,25.45 180 bottom
C122  10uF,_10V  [805_2PRIMARY]  76.07,23.11 0 bottom
C123  1nF,_50V  [402_1PRIMARY]  71.63,30.63 180 bottom
C124  0.1uf,_6V3  [402_1PRIMARY]  71.63,28.24 0 bottom
C125  2.2uF,_6V3  [402_1PRIMARY]  40.51,53.26 90 bottom
C126  10uF,_10V  [805_2PRIMARY]  31.62,48.18 90 bottom
C127  0.1uf,_6V3  [402_2PRIMARY]  33.53,48.18 270 bottom
C128  0.1uf,_6V3  [402_1PRIMARY]  37.34,48.18 90 bottom
C129  0.1uf,_6V3  [402_2PRIMARY]  38.61,48.18 270 bottom
C130  0.1uf,_6V3  [402_2PRIMARY]  42.42,48.18 270 bottom
C152  0.1uf,_6V3  [402_1PRIMARY]  34.16,28.19 90 bottom
C153  10uF,_10V  [805_1PRIMARY]  89.41,43.99 90 top
C154  0.1uf,_6V3  [402_2PRIMARY]  91.31,43.99 90 top
C155  0.1uf,_6V3  [402_2PRIMARY]  63.5,17.7 270 bottom
C158  0.1uf,_6V3  [402_1PRIMARY]  47.8,53.26 90 bottom
C159  0.1uf,_6V3  [402_2PRIMARY]  47.8,48.18 270 bottom
D1  598-8170-107F  [LED_0603_1PRIMARY]  11.94,22.15 0 top
D2  598-8170-107F  [LED_0603_1PRIMARY]  11.3,53.59 0 top
D3  598-8170-107F  [LED_0603_1PRIMARY]  11.3,51.69 0 top
D4  598-8170-107F  [LED_0603_1PRIMARY]  11.3,49.78 0 top
D5  598-8170-107F  [LED_0603_1PRIMARY]  11.3,47.88 0 top
DUMMY1  [P:EX40Y40D01]  13.21,9.13 0 top
DUMMY2  [P:EX40Y40D01]  81.15,13.9 0 top
DUMMY3  [P:EX40Y40D01]  25.27,53.58 0 top
FB1  150OHM800mA  [SM-7351-IND-0805_1PRIMARY]  42.42,38.35 0 bottom
FB2  150OHM800mA  [SM-7351-IND-0805_1PRIMARY]  54.48,22.48 90 bottom
FB3  150OHM800mA  [SM-7351-IND-0805_1PRIMARY]  51.94,22.48 90 bottom
FB4  150OHM800mA  [SM-7351-IND-0805_1PRIMARY]  31.62,42.16 180 bottom
FB5  150OHM800mA  [SM-7351-IND-0805_1PRIMARY]  64.01,43.1 90 bottom
FB7  150OHM800mA  [SM-7351-IND-0805_1PRIMARY]  76.07,17.45 0 bottom
FB8  0.1_Ohm,_0805  [SM-7351-IND-0805_1PRIMARY]  72.14,17.45 0 bottom
J1  HEADER_6  [SIP6_1PRIMARY]  57.02,13.89 90 top
L1  2.2uH,_2.6A  [2520_1PRIMARY]  29.64,14.86 180 bottom
L2  2.2uH,_2.6A  [2520_1PRIMARY]  33.78,14.86 0 bottom
L3  2.2uH,_2.6A  [2520_1PRIMARY]  37.01,21.51 90 bottom
MTG1  MHOLE  [MTGH200C125D_PL_1PRIMARY]  22.73,9.86 90 top
MTG2  MHOLE  [MTGH200C125D_PL_1PRIMARY]  88.77,13.03 90 top
MTG3  MHOLE  [MTGH200C125D_PL_1PRIMARY]  22.73,58.12 90 top
MTG4  MHOLE  [MTGH200C125D_PL_1PRIMARY]  88.77,54.94 90 top
P2  CTI_JTAG,DNI  [HEADER10X2_SMD_1PRIMARY]  43.36,19.3 270 bottom
P3  USB-A_Conn._-_87520-xx1xx  [USB_A_SH_1PRIMARY]  87.45,23.09 90 top
P4  mini_USB-B  [USB5MINI_4SHIELDED_SMD-5_1PRIMARY]  11.23,50.42 0 bottom
R1  100K,_1%  [402_2PRIMARY]  31.29,28.19 270 bottom
R3  1.5K,_1%  [402_2PRIMARY]  34.16,28.19 270 top
R4  1.5K,_1%  [402_2PRIMARY]  35.1,28.19 270 top
R5  0R,_1%  [402_2PRIMARY]  24.31,22.15 180 top
R6  0R,_1%  [402_2PRIMARY]  26.92,14.91 270 bottom
R7  0R,_1%  [402_2PRIMARY]  19.56,22.15 180 top
R8  0R,_1%  [402_2PRIMARY]  19.56,23.42 180 top
R9  0R,_1%,_DNI  [402_2PRIMARY]  19.56,24.69 0 top
R10  470K,_5%  [402_2PRIMARY]  16.38,23.42 180 top
R11  280K,_1%  [402_1PRIMARY]  16.38,24.69 180 bottom
R12  820,_5%  [402_1PRIMARY]  11.94,22.78 0 bottom
R14  10K,_1%  [402_1PRIMARY]  37.01,18.34 0 bottom
R17  1M,_1%  [402_1PRIMARY]  53.34,45.26 0 bottom
R18  33,_0402  [402_2PRIMARY]  50.04,17.7 270 bottom
R19  0R,_1%  [402_2PRIMARY]  49.71,25.96 270 bottom
R20  0R,_1%  [402_1PRIMARY]  50.67,25.96 90 bottom
R21  33,_0402  [402_2PRIMARY]  56.39,17.7 270 bottom
R22  49.9,_1%  [402_1PRIMARY]  64.01,34.7 0 bottom
R23  4.75K,_1%  [402_2PRIMARY]  44.96,18.67 270 top
R24  4.75K,_1%  [402_2PRIMARY]  44.96,20.88 90 top
R25  4.75K,_1%  [402_2PRIMARY]  44.96,14.86 90 top
R26  4.75K,_1%  [402_1PRIMARY]  58.29,25.96 90 bottom
R27  0R,_1%  [402_2PRIMARY]  52.73,25.65 180 top
R28  33,_0402  [402_2PRIMARY]  42.42,34.09 180 top
R45  33,_0402  [402_2PRIMARY]  58.29,50.22 90 top
R46  33,_0402  [402_2PRIMARY]  59.56,50.22 90 top
R47  33,_0402  [402_2PRIMARY]  59.56,46.66 90 top
R48  33,_0402  [402_2PRIMARY]  58.29,46.66 90 top
R49  0R,_1%  [402_1PRIMARY]  46.23,40.26 180 bottom
R50  0R,_1%  [402_2PRIMARY]  44.96,24.05 270 top
R51  0R,_1%  [402_1PRIMARY]  48.77,25.96 90 bottom
R52  10k,_1%  [402_2PRIMARY]  91.29,24.69 270 bottom
R53  10k,_1%  [402_1PRIMARY]  84.94,24.69 90 bottom
R54  10k,_1%  [402_1PRIMARY]  59.23,25.96 90 bottom
R55  100K,_1%,_DNI  [402_1PRIMARY]  66.55,53.26 90 bottom
R56  100K,_1%  [402_1PRIMARY]  65.58,53.26 90 bottom
R57  100K,_1%,_DNI  [402_1PRIMARY]  68.45,53.26 90 bottom
R58  100K,_1%,DNI  [402_1PRIMARY]  69.39,53.26 90 bottom
R59  100K,_1%,_DNI  [402_1PRIMARY]  67.49,53.26 90 bottom
R60  100K,_1%,DNI  [402_1PRIMARY]  70.36,53.26 90 bottom
R61  100K,_1%,DNI  [402_1PRIMARY]  71.3,53.26 90 bottom
R62  100K,_1%,DNI  [402_1PRIMARY]  72.26,53.26 90 bottom
R63  100K,_1%,DNI  [402_1PRIMARY]  73.2,53.26 90 bottom
R64  100K,_1%,DNI  [402_1PRIMARY]  74.17,53.26 90 bottom
R65  100K,_1%  [402_1PRIMARY]  75.11,53.26 90 bottom
R66  100K,_1%  [402_1PRIMARY]  76.07,53.26 90 bottom
R67  100K,_1%  [402_1PRIMARY]  77.01,53.26 90 bottom
R68  100K,_1%  [402_1PRIMARY]  77.98,53.26 90 bottom
R69  100K,_1%,_DNI  [402_1PRIMARY]  78.92,53.26 90 bottom
R70  100K,_1%,DNI  [402_1PRIMARY]  79.88,53.26 90 bottom
R71  820,_5%  [402_2PRIMARY]  14.48,50.72 180 top
R72  820,_5%  [402_2PRIMARY]  14.48,53.59 180 top
R73  820,_5%  [402_2PRIMARY]  14.48,52.63 180 top
R74  820,_5%  [402_2PRIMARY]  14.48,51.69 180 top
R75  100  [402_2PRIMARY]  81.79,53.26 270 top
R76  100K,_1%  [402_1PRIMARY]  21.13,52.32 90 bottom
R77  100K,_1%  [402_2PRIMARY]  22.4,52.32 270 bottom
R78  100K,_1%  [402_1PRIMARY]  17.65,52.32 90 bottom
R79  100K,_1%  [402_2PRIMARY]  18.92,52.32 270 bottom
R80  100K,_1%  [402_2PRIMARY]  66.55,53.26 270 top
R81  100K,_1%,_DNI  [402_2PRIMARY]  65.58,53.26 270 top
R82  100K,_1%  [402_2PRIMARY]  68.45,53.26 270 top
R83  100K,_1%  [402_2PRIMARY]  69.39,53.26 270 top
R84  100K,_1%  [402_2PRIMARY]  67.49,53.26 270 top
R85  100K,_1%  [402_2PRIMARY]  70.36,53.26 270 top
R86  100K,_1%  [402_2PRIMARY]  71.3,53.26 270 top
R87  100K,_1%  [402_2PRIMARY]  72.26,53.26 270 top
R88  100K,_1%  [402_2PRIMARY]  73.2,53.26 270 top
R89  100K,_1%  [402_2PRIMARY]  74.17,53.26 270 top
R90  100K,_1%,_DNI  [402_2PRIMARY]  75.11,53.26 270 top
R91  100K,_1%,_DNI  [402_2PRIMARY]  76.07,53.26 270 top
R92  100K,_1%,_DNI  [402_2PRIMARY]  77.01,53.26 270 top
R93  100K,_1%,_DNI  [402_2PRIMARY]  77.98,53.26 270 top
R94  100K,_1%  [402_2PRIMARY]  78.92,53.26 270 top
R95  100K,_1%  [402_2PRIMARY]  79.88,53.26 270 top
R96  10k,_1%  [402_1PRIMARY]  76.71,29.44 0 bottom
R97  1.5K,_1%  [402_1PRIMARY]  71.63,25.45 0 bottom
R98  10k,_1%  [402_1PRIMARY]  71.63,31.85 0 bottom
R99  240,_1%  [402_2PRIMARY]  76.71,28.24 0 bottom
R100  10k,_1%  [402_1PRIMARY]  71.63,29.44 0 bottom
R101  10k,_1%  [402_1PRIMARY]  57.02,53.26 90 bottom
R102  10k,_1%  [402_1PRIMARY]  54.48,53.26 90 bottom
R103  10k,_1%  [402_1PRIMARY]  34.16,53.26 90 bottom
R104  10k,_1%  [402_1PRIMARY]  35.43,53.26 90 bottom
R105  10k,_1%  [402_1PRIMARY]  55.75,53.26 90 bottom
R106  10k,_1%  [402_1PRIMARY]  51.94,53.26 90 bottom
R107  10k,_1%  [402_1PRIMARY]  31.62,53.26 90 bottom
R108  10k,_1%  [402_1PRIMARY]  32.89,53.26 90 bottom
R109  10k,_1%  [402_1PRIMARY]  50.67,53.26 90 bottom
R110  10k,_1%  [402_1PRIMARY]  53.21,53.26 90 bottom
R111  10k,_1%  [402_2PRIMARY]  37.34,53.26 270 bottom
R112  1.5K,_1%  [402_1PRIMARY]  38.61,37.08 180 bottom
R150  10k,_1%  [402_2PRIMARY]  89.41,48.44 90 top
R151  10k,_1%  [402_2PRIMARY]  91.31,48.44 90 top
R152  10k,_1%  [402_2PRIMARY]  91.31,39.55 270 top
R153  10k,_1%  [402_2PRIMARY]  90.35,39.55 270 top
R154  10k,_1%  [402_2PRIMARY]  89.41,39.55 270 top
R155  10k,_1%  [402_2PRIMARY]  90.35,48.44 90 top
R156  10k,_1%  [402_1PRIMARY]  33.2,28.19 90 bottom
R157  10k,_1%  [402_2PRIMARY]  79.88,49.45 270 top
R159  0R,_1%  [402_1PRIMARY]  31.62,44.7 180 bottom
R160  0R,_1%  [402_1PRIMARY]  46.53,48.18 90 bottom
R161  0R,_1%  [402_1PRIMARY]  45.26,48.18 90 bottom
R162  0R,_1%  [402_2PRIMARY]  38.61,53.26 270 bottom
R163  4.75K,_1%  [402_1PRIMARY]  56.06,22.48 90 bottom
R164  4.75K,_1%  [402_1PRIMARY]  57.33,22.48 90 bottom
R165  100K,_1%  [402_2PRIMARY]  54.48,17.7 90 top
R167  33,_0402  [402_2PRIMARY]  49.07,48.18 270 bottom
S1  KMR231GLFS  [SW4SMD_63X161LS_1PRIMARY]  16.05,57.71 180 top
S2  KMR231GLFS  [SW4SMD_63X161LS_1PRIMARY]  83.69,49.45 180 top
S3  KMR231GLFS  [SW4SMD_63X161LS_1PRIMARY]  16.05,48.18 180 top
TP1  TESTPT1  [TP1-8040_1PRIMARY]  67.18,17.07 0 top
TP2  TESTPT1  [TP60C_SMD_1PRIMARY]  65.58,21.84 0 top
TP3  TESTPT1  [TP60C_SMD_1PRIMARY]  59.56,25.96 0 top
TP4  TESTPT1  [TP1-8040_1PRIMARY]  11.94,25.32 0 top
U3  SN74LVC1G06DCK  [DCK5_2P15X1P4_1PRIMARY]  48.44,51.99 0 top
U4  TL5209  [SO8-25X75_1PRIMARY]  21.77,22.78 270 bottom
U5  IC_AM335X_ZCE_1  [AM33XX_15X15_1PRIMARY]  53.85,35.48 180 top
U6  SN74LVC1G74DCTR  [SOP8_DCT_1PRIMARY]  53.21,17.7 270 bottom
U7  24LC32A  [SOT23-5_1PRIMARY]  37.64,28.19 90 bottom
U8  TPS2051__DGN_  [DGN-16X60_1PRIMARY]  87.48,20.88 270 bottom
U9  TPD4S012  [U_6_DRY_1PRIMARY]  87.48,24.69 90 bottom
U10  TPD4S012  [U_6_DRY_1PRIMARY]  21.13,48.18 270 top
U12  MT41K256M16HA_-125:E  [BGA96_T9_P8_9X14_1PRIMARY]  71.63,31.04 0 top
U13  eMMC,_2GB  [BGA153_P14_P5_11P5X13_1PRIMARY]  37.97,48.18 270 top
U15  SN74LVC2G241  [U_8_DCU_1PRIMARY]  60.71,17.7 270 bottom
Y1  32.768kHz  [XTAL4_126-216SMD_1PRIMARY]  59.23,20.24 270 top
Y2  24MHz  [XTAL150SMD_125X196_1PRIMARY]  53.34,47.68 180 bottom
Y4  24.576MHz  [OSC4_61X65LS_79X98SMD_1PRIMARY]  48.44,47.88 0 top

## Library data of the parts
C1-C4 C7-C22 C24-C130 C152-C155 C158 C159 D1-D5 DUMMY1-DUMMY3 FB1-FB5 FB7 FB8 J1 L1-L3 MTG1-MTG4 P2-P4 R1 R3-R12 R14 R17-R28 R45-R112 R150-R157 R159-R165 R167 S1-S3 TP1-TP4 U3-U10 U12 U13 U15 Y1 Y2 Y4 = BeagleBone_Black_RevB4

## Nets
12M_LOOP: U6.2 U6.3
12MHZ: R21.2
AIN0: U5.24
AIN1: U5.43
AIN2: U5.25
AIN3: U5.7
AIN4: U5.44
AIN5: U5.26
AIN6: U5.8
AIN7: R163.2 R164.1 U5.45
B_UART0_RX: J1.4 R165.1 U15.2
B_UART0_TX: J1.5 U15.3
CAP_VBB_MPU: C91.1 U5.46
CAP_VDD_SRAM_CORE: C89.1 U5.63
CAP_VDD_SRAM_MPU: C90.1 U5.65
CLKOUT2: P2.18 R19.2 R20.1
CLKOUT_SRC: R19.1 U5.68
DDR_A0: U5.93 U12.75
DDR_A1: U5.127 U12.82
DDR_A2: U5.76 U12.81
DDR_A3: U5.39 U12.74
DDR_A4: U5.38 U12.83
DDR_A5: U5.19 U12.80
DDR_A6: U5.59 U12.89
DDR_A7: U5.74 U12.86
DDR_A8: U5.58 U12.95
DDR_A9: U5.37 U12.87
DDR_A10: U5.94 U12.64
DDR_A11: U5.92 U12.88
DDR_A12: U5.75 U12.76
DDR_A13: U5.129 U12.93
DDR_A14: U5.130 U12.94
DDR_A15: U5.57 U12.70
DDR_BA0: U5.40 U12.68
DDR_BA1: U5.73 U12.77
DDR_BA2: U5.21 U12.69
DDR_CASN: U5.91 U12.57
DDR_CKE: R96.2 U5.111 U12.60
DDR_CLK: U5.56 U12.52
DDR_CLKN: U5.55 U12.58
DDR_CSN: U5.128 U12.62
DDR_D0: U5.201 U12.27
DDR_D1: U5.202 U12.34
DDR_D2: U5.217 U12.32
DDR_D3: U5.218 U12.35
DDR_D4: U5.219 U12.45
DDR_D5: U5.220 U12.47
DDR_D6: U5.237 U12.38
DDR_D7: U5.238 U12.46
DDR_D8: U5.145 U12.22
DDR_D9: U5.163 U12.15
DDR_D10: U5.164 U12.17
DDR_D11: U5.165 U12.14
DDR_D12: U5.166 U12.4
DDR_D13: U5.183 U12.2
DDR_D14: U5.184 U12.11
DDR_D15: U5.199 U12.3
DDR_DQM0: U5.200 U12.28
DDR_DQM1: U5.146 U12.21
DDR_DQS0: U5.235 U12.33
DDR_DQS1: U5.181 U12.16
DDR_DQSN0: U5.236 U12.39
DDR_DQSN1: U5.182 U12.10
DDR_ODT: U5.109 U12.55
DDR_RASN: U5.112 U12.51
DDR_RESETN: R97.2 U5.110 U12.92
DDR_VREF: C28.1 C123.1 C124.1 R98.2 R100.1 U5.148 U12.43 U12.71
DDR_VTP: R22.2 U5.147
DDR_WEN: U5.20 U12.63
DGND: C1.1 C2.1 C3.1 C4.1 C7.1 C8.1 C9.1 C10.1 C11.1 C12.1 C13.1 C14.1 C15.1 C16.2 C17.2 C18.2 C19.2 C20.2 C24.2 C27.2 C28.2 C29.2 C30.2 C34.2 C35.2 C37.2 C38.2 C39.1 C40.1 C41.2 C42.2 C43.2 C44.2 C45.2 C46.2 C47.2 C48.2 C49.2 C50.2 C51.2 C52.2 C53.2 C54.2 C55.1 C56.1 C57.1 C58.2 C59.2 C60.1 C61.1 C62.1 C63.2 C64.2 C65.2 C66.2 C67.2 C68.1 C69.1 C70.1 C71.1 C72.1 C73.1 C74.1 C75.1 C76.1 C77.2 C78.2 C79.2 C80.2 C81.2 C82.2 C83.2 C84.2 C85.2 C86.2 C87.2 C88.2 C89.2 C90.2 C91.2 C92.2 C94.2 C95.1 C96.1 C97.2 C98.2 C99.2 C100.2 C101.2 C102.2 C103.2 C104.2 C105.2 C106.2 C107.2 C108.2 C109.2 C110.2 C111.2 C112.2 C113.2 C114.2 C115.2 C116.2 C117.2 C118.1 C119.2 C120.2 C121.2 C122.1 C123.2 C124.2 C125.2 C126.1 C127.2 C128.2 C129.2 C130.2 C152.2 C153.2 C154.2 C155.1 C158.2 C159.2 FB3.2 J1.1 P2.4 P2.8 P2.10 P2.12 P2.16 P2.20 P3.4 R10.2 R12.1 R22.1 R25.2 R49.1 R53.2 R54.1 R80.2 R81.2 R82.2 R83.2 R84.2 R85.2 R86.2 R87.2 R88.2 R89.2 R90.2 R91.2 R92.2 R93.2 R94.2 R95.2 R96.1 R99.1 R100.2 R164.2 R165.2 S2.2 S2.4 TP1.1 U3.3 U4.5 U4.6 U4.7 U4.8 U5.1 U5.18 U5.98 U5.116 U5.117 U5.119 U5.120 U5.132 U5.133 U5.134 U5.135 U5.136 U5.138 U5.150 U5.151 U5.152 U5.153 U5.154 U5.155 U5.169 U5.171 U5.172 U5.173 U5.190 U5.191 U5.192 U5.193 U5.204 U5.205 U5.206 U5.207 U5.208 U5.210 U5.212 U5.223 U5.226 U5.227 U5.230 U5.307 U5.324 U6.4 U7.2 U8.1 U8.9 U9.4 U12.6 U12.7 U12.9 U12.12 U12.19 U12.23 U12.25 U12.26 U12.29 U12.36 U12.37 U12.41 U12.42 U12.50 U12.53 U12.67 U12.72 U12.79 U12.84 U12.91 U12.96 U13.32 U13.55 U13.73 U13.82 U13.100 U13.127 U13.130 U13.143 U13.145 U15.1 U15.4 Y4.2
EHRPWM1A: U5.302
EHRPWM1B: U5.284
EHRPWM2A: U5.298
EHRPWM2B: U5.280
EMMC_RSTN: R111.2 R162.2 U13.97
EMMC_VCCI: C125.1 U13.30
ENZ_KALDO_1P8V: R54.2 U5.22
GND_EARTH: MTG2.1 MTG3.1 MTG4.1 P3.5 P3.6 P4.6 P4.7 P4.8 P4.9
GND_OSC0: C25.2 C26.2 U5.317
GND_OSC1: C21.1 C22.1 U5.5
GNDA_ADC: C31.2 C32.2 C33.2 C93.2 FB3.1 U5.9 U5.80
GPIO0_7: R50.1 R51.1
GPIO0_7SRC: R50.2 U5.54
GPIO0_26: U5.281
GPIO0_27: U5.300
GPIO1_12: U5.282
GPIO1_13: U5.264
GPIO1_14: U5.319
GPIO1_15: U5.301
GPIO1_16: R160.2 R161.2
GPIO1_17: U5.320
GPIO1_28: U5.306
GPIO1_29: U5.312
GPIO2_1: U5.318
GPIO3_18: R51.2 U5.30
GPIO3_19: U5.49
GPIO3_20: R20.2 U5.67
GPIO3_21: R167.2 U5.14
HDMI_1V8: FB5.1
HDMI_INT: U5.304
HDMICLK_DISN: U5.323 Y4.1
I2C0_SCL: R3.2 U5.52 U7.1
I2C0_SDA: R4.2 U5.53 U7.3
I2C1_SCL: U5.16
I2C1_SDA: U5.34
I2C2_SCL: U5.71
I2C2_SDA: U5.72
JTAG_EMU0: P2.13 R23.2 U5.50
JTAG_EMU1: P2.14 R24.2 U5.32
JTAG_TCK: P2.9 P2.11 U5.12
JTAG_TDI: P2.3 U5.29
JTAG_TDO: P2.7 U5.11
JTAG_TMS: P2.1 U5.47
JTAG_TRSTN: P2.2 R25.1 U5.28
LCD_DATA0: R70.2 R95.1 U5.253
LCD_DATA1: R69.2 R94.1 U5.254
LCD_DATA2: R68.2 R75.1 R93.1 U5.255
LCD_DATA3: R67.2 R92.1 U5.256
LCD_DATA4: R66.2 R91.1 U5.271
LCD_DATA5: R65.2 R90.1 U5.272
LCD_DATA6: R64.2 R89.1 U5.273
LCD_DATA7: R63.2 R88.1 U5.274
LCD_DATA8: R62.2 R87.1 U5.289
LCD_DATA9: R61.2 R86.1 U5.290
LCD_DATA10: R60.2 R85.1 U5.291
LCD_DATA11: R59.2 R84.1 U5.292
LCD_DATA12: R58.2 R83.1 U5.308
LCD_DATA13: R57.2 R82.1 U5.309
LCD_DATA14: R56.2 R81.1 U5.310
LCD_DATA15: R55.2 R80.1 U5.275
LCD_DE: R48.2
LCD_HSYNC: R47.2
LCD_PCLK: R45.2
LCD_VSYNC: R46.2
LCDDE: R48.1 U5.258
LCDPCLK: R45.1 U5.311
LCDVHYNC: R47.1 U5.257
LCDVSYNC: R46.1 U5.293
LDO_PGOOD: U5.23
LEDAA: D2.2 R72.2
LEDAC: D2.1
LEDBA: D3.2 R73.2
LEDBC: D3.1
LEDCA: D4.2 R74.2
LEDCC: D4.1
LEDDA: D5.2 R71.2
LEDDC: D5.1
MDIO_CLK: U5.216
MDIO_DATA: U5.215
MII1_COL: U5.142
MII1_CRS_DV: U5.143
MII1_REFCLK: R28.2
MII1_RXCLK: U5.198
MII1_RXD0: U5.214
MII1_RXD1: U5.195
MII1_RXD2: U5.196
MII1_RXD3: U5.197
MII1_RXDV: U5.161
MII1_RXERR: U5.159
MII1_TXCLK: U5.180
MII1_TXD0: U5.179
MII1_TXD1: U5.178
MII1_TXD2: U5.177
MII1_TXD3: U5.162
MII1_TXEN: U5.160
MMC0_CD: P2.19 R157.1 U5.51
MMC0_CLKO: R152.2 U5.125
MMC0_CMD: R151.2 U5.126
MMC0_DAT0: R153.2 U5.124
MMC0_DAT1: R154.2 U5.123
MMC0_DAT2: R150.2 U5.108
MMC0_DAT3: R155.2 U5.107
MMC1_CLK: R110.2 U5.297 U13.117
MMC1_CMD: R109.2 U5.315 U13.116
MMC1_DAT0: R101.2 U5.295 U13.3
MMC1_DAT1: R102.2 U5.313 U13.4
MMC1_DAT2: R103.2 U5.260 U13.5
MMC1_DAT3: R104.2 U5.278 U13.16
MMC1_DAT4: R105.2 U5.296 U13.17
MMC1_DAT5: R106.2 U5.314 U13.18
MMC1_DAT6: R107.2 U5.261 U13.19
MMC1_DAT7: R108.2 U5.279 U13.20
NETC19_1: C19.1 R10.1 R11.2 U4.4
NETR21_1: R21.1 U6.5
NETR75_2: R75.2 S2.1 S2.3
NETR159_2: R159.2 U5.249
NETR162_1: R162.1 U3.4
NETR167_1: R167.1 Y4.3
NETU3_2: U3.2 U5.266
OSC0_IN: C25.1 R17.1 U5.316 Y2.2
OSC0_OUT: C26.1 R17.2 U5.299 Y2.1
OSC1_IN: C21.2 U5.6 Y1.1
OSC1_OUT: C22.2 U5.4 Y1.4
P_BYPASS: C4.2
P_INT_LDO: C3.2
P_L1: L1.1
P_L2: L2.1
P_L3: L3.1
PMIC_INT: R1.2 U5.36
PMIC_PGOOD: U5.33
PMIC_POWR_EN: U5.42
PROC_A15: R18.1 U5.15
PWR_BUT: S3.2 S3.4
PWR_LEDR: D1.1 R12.2
RXD0_MODE0: R112.1
S$41: MTG1.1
S$42: C36.2 P4.5 R76.2 R77.2 R78.2 R79.2 S1.1 S1.3 S3.1 S3.3 U10.4
SPI1_CS0: U5.48
SPI1_D0: U5.31
SPI1_D1: U5.66
SPI1_SCLK: U5.13
SYS_5V: C7.2 C8.2 C10.2 C13.2 C17.1 C34.1 R71.1 R72.1 R73.1 R74.1 U4.2 U8.2 U8.3
SYS_RESETN: C24.1 C30.1 P2.15 R14.2 S1.2 S1.4 U5.10
TESTOUT: TP3.1 U5.3
TIMER4: U5.259
TIMER5: U5.276
TIMER6: U5.294
TIMER7: U5.277
U5_H18: R28.1 U5.144
U5_R13: R160.1 U5.265
U5_T13: R161.1 U5.283
UART0_RX: U5.87 U15.6
UART0_TX: U5.88 U15.5
UART1_RXD: U5.70
UART1_TXD: U5.69
UART2_RXD: U5.17
UART2_TXD: U5.35
UART4_RXD: U5.287
UART4_TXD: U5.305
USB0_DM: P4.2 U5.234 U10.2
USB0_DP: P4.3 U5.233 U10.1
USB0_ID: P4.4 U5.250 U10.3
USB1_DM: P3.2 U5.270 U9.2
USB1_DP: P3.3 U5.269 U9.1
USB1_DRVVBUS: R53.1 U5.105 U8.4
USB1_ID: R49.2 U5.251
USB1_OCN: R52.2 U5.286 U8.5
USB1_PWR: C35.1 FB7.1 FB8.2 U8.6 U8.7 U8.8 U9.6
USB1_VBUS: FB8.1 U5.288
USB_DC: C1.2 C36.1 P4.1 R159.1 U10.6
USR0: R76.1 U5.321
USR1: R77.1 U5.303
USR2: R78.1 U5.285
USR3: R79.1 U5.322
VBUS: FB7.2 P3.1
VDCDC1: L1.2 R6.1
VDD_1V8: C14.2 C78.1 C86.1 C88.1 FB1.1 FB2.2 FB5.2 R9.2 U5.64 U5.81 U5.232 U5.268
VDD_3V3A: C15.2 C27.1 C37.1 C38.1 C56.2 C57.2 C58.1 C59.1 C60.2 C61.2 C66.1 C67.1 C68.2 C69.2 C70.2 C71.2 C72.2 C73.2 C74.2 C75.2 C76.2 C77.1 C87.1 C152.1 C158.1 C159.1 R1.1 R3.1 R4.1 R14.1 R52.1 R55.1 R56.1 R57.1 R58.1 R59.1 R60.1 R61.1 R62.1 R63.1 R64.1 R65.1 R66.1 R67.1 R68.1 R69.1 R70.1 R156.1 U3.5 U5.82 U5.83 U5.84 U5.85 U5.104 U5.122 U5.140 U5.158 U5.176 U5.194 U5.221 U5.231 U5.239 U5.240 U5.241 U5.242 U5.244 U5.245 U5.246 U5.247 U5.267 U6.6 U6.7 U6.8 U7.4 Y4.4
VDD_3V3AUX: C18.1 D1.2 U4.1
VDD_3V3B: C20.1 C29.1 C126.2 C127.1 C128.1 C129.1 C130.1 C153.1 C154.1 C155.2 FB4.1 P2.5 R11.1 R23.1 R24.1 R101.1 R102.1 R103.1 R104.1 R105.1 R106.1 R107.1 R108.1 R109.1 R110.1 R111.1 R112.2 R150.1 R151.1 R152.1 R153.1 R154.1 R155.1 R157.2 R163.1 U4.3 U13.34 U13.54 U13.65 U13.90 U13.101 U13.115 U13.129 U13.142 U13.144 U15.7 U15.8
VDD_5V: C2.2
VDD_ADC: C93.1 FB2.1 R27.1 U5.62
VDD_CORE: C11.2 C39.2 C40.2 C41.1 C42.1 C43.1 C44.1 C45.1 C46.1 C47.1 C48.1 C49.1 C50.1 C51.1 C52.1 C53.1 C54.1 C55.2 L3.2 U5.96 U5.97 U5.114 U5.115 U5.118 U5.137 U5.156 U5.168 U5.170 U5.174 U5.186 U5.187 U5.188 U5.189 U5.209 U5.211 U5.224 U5.225 U5.228 U5.229
VDD_MPU: C12.2 C62.2 C63.1 C64.1 C65.1 L2.2 U5.100 U5.101 U5.102 U5.103 U5.121 U5.139 U5.157
VDD_MPUON: TP2.1 U5.2
VDD_PHYA: FB4.2
VDD_PLL: C79.1 C92.1 C94.1 C106.1 FB1.2 U5.79 U5.141 U5.262 U5.263
VDD_RTC: C104.1 U5.60
VDDS: C80.1 C81.1 C82.1 C83.1 C84.1 C85.1 R8.2 R9.1 U5.78 U5.86 U5.99 U5.175 U5.222 U5.243 U5.248
VDDS_DDR: C9.2 C95.2 C96.2 C97.1 C98.1 C99.1 C100.1 C101.1 C102.1 C103.1 C107.1 C108.1 C109.1 C110.1 C111.1 C112.1 C113.1 C114.1 C115.1 C116.1 C117.1 C118.2 C119.1 C120.1 C121.1 C122.2 R6.2 R97.1 R98.1 U5.77 U5.95 U5.113 U5.131 U5.149 U5.167 U5.185 U12.1 U12.5 U12.8 U12.13 U12.18 U12.20 U12.24 U12.30 U12.31 U12.40 U12.44 U12.48 U12.56 U12.59 U12.73 U12.78 U12.85 U12.90
VIO: R7.2
VLDO1: R5.1 R7.1 R8.1
VREFP_ADC: C31.1 C32.1 C33.1 R27.2 U5.27
VRTC: C16.1 C105.1 R5.2 R26.1 U5.61
WAKEUP: R26.2 U5.41
WP: R156.2 TP4.1 U7.5
XDMA_EVENT_INTR0: P2.17 R18.2 U6.1
ZQ: R99.2 U12.65

## Tracks (layer width: path | path; a pad name or v marks a point on that pad's centre or on a via)
12M_LOOP
  Bottom 0.121: U6.2 52.58,17.37 52.7,17.5 52.7,17.91 52.58,18.03 U6.3
12MHZ  (via drill 0.2 pad 0.46)
  Top 0.121: 72.87,41.94 72.87,41.22 v73.03,41.07
  Route4 0.133: v73.03,41.07 73.53,41.58 77.34,41.58 79.5,39.42 79.5,24.43 78.61,23.55 77.52,23.55 74.47,20.5 70.1,20.5 v68.33,18.72
  Bottom 0.121: v68.33,18.72 67.69,19.36 57.78,19.36 57.15,18.72 57.15,17.45 56.9,17.2 R21.2
AIN7  (via drill 0.2 pad 0.46)
  Top 0.121: U5.45 v54.63,29.9
  Route4 0.133: v56.39,24.05 55.88,24.56 55.88,28.65 v54.63,29.9
  Bottom 0.121: R164.1 56.9,21.97 56.69,22.15 56.69,22.78 56.52,22.99 R163.2 56.06,23.75 v56.39,24.05
B_UART0_RX
  Top 0.121: J1.4 57.15,12.75 55.24,12.75 54.48,13.51 R165.1
  Bottom 0.121: J1.4 60.33,15.93 60.33,17.2 60.07,17.45 U15.2
B_UART0_TX
  Bottom 0.121: U15.3 60.07,17.96 60.58,17.45 60.58,15.16 60.83,14.91 J1.5
CAP_VBB_MPU  (via drill 0.2 pad 0.46)
  Top 0.121: v53.03,29.9 53.06,29.9 U5.46
  Bottom 0.121: v53.03,29.9 53.03,29.18 53.52,28.7 C91.1
CAP_VDD_SRAM_CORE  (via drill 0.2 pad 0.46)
  Top 0.121: U5.63 v54.63,30.68
  Bottom 0.121: v54.63,30.68 55.04,30.28 55.04,29.31 54.48,28.75 C89.1
CAP_VDD_SRAM_MPU  (via drill 0.2 pad 0.46)
  Top 0.121: v52.25,30.68 U5.65
  Bottom 0.121: v52.25,30.68 52.65,30.28 52.65,26.54 C90.1
CLKOUT2
  Bottom 0.121: P2.18 44.12,23.75 43.79,24.08 43.79,26.26 44.4,26.85 48.01,26.85 48.26,27.1 49.02,27.1 49.2,26.92 49.2,25.96 R19.2 R20.1
CLKOUT_SRC  (via drill 0.2 pad 0.46)
  Top 0.121: v49.84,30.68 U5.68
  Bottom 0.121: v49.84,30.68 49.45,30.28 49.45,29.54 49.71,29.26 R19.1
CRS  (via drill 0.2 pad 0.46)
  Top 0.121: 38.1,38.99 37.64,38.51 37.06,38.51 v36.58,38.05 36.47,38.15 35.71,38.15
DDR_A0  (via drill 0.2 pad 0.46)  (1 unrouted)
  Top 0.121: U5.93 v59.44,32.28
  Route3 0.133: v61.98,29.39 61.47,29.39 61.34,29.26 61.34,27.48 62.99,25.83 62.99,25.58 65.15,23.42 69.72,23.42 70.48,24.18 70.48,26.98 70.1,27.36 69.95,27.36 69.62,27.05
  Bottom 0.121: v61.98,29.39 60.71,30.66 60.71,32.44 60.45,32.69 59.84,32.69 v59.44,32.28
DDR_A1  (via drill 0.2 pad 0.46)  (1 unrouted)
  Top 0.121: U5.127 62.66,34.29 64.69,32.26 65.84,32.26 67.06,31.04 v67.06,30.15
  Route3 0.121: 68.33,30.15 68.63,29.84 69.8,29.84
  Route3 0.133: v67.06,30.15 68.33,30.15 | 69.8,29.84 69.9,29.84 70.36,29.39 70.74,29.39 72.01,28.12 72.01,27.1 71.63,26.72 71.63,25.17 71.75,25.04 72.52,25.04 72.64,25.17 72.64,25.32 72.52,25.45 72.14,25.45 72.01,25.58 72.01,26.47 72.14,26.59 72.26,26.59 72.39,26.47 72.39,25.96 72.52,25.83 72.77,25.83 72.9,25.96 72.9,26.47 73.03,26.59 73.28,26.59 73.64,26.24
DDR_A2  (via drill 0.2 pad 0.46)  (1 unrouted)
  Top 0.121: U5.76 v58.65,31.5
  Route3 0.121: 69.62,26.24 69.22,26.64 69.22,28.37
  Route3 0.133: 69.22,28.37 68.96,28.63 67.56,28.63 67.18,28.25 64.9,28.25 64.77,28.37 64.77,29.77 64.9,29.9 65.53,29.9 65.63,30 65.63,30.43 65.53,30.53 64.9,30.53 64.77,30.66 64.77,31.67 62.84,33.6 62.64,33.6 62.38,33.35 62.38,33.17 63.25,32.31 63.25,31.42 62.48,30.66 59.26,30.66 58.65,31.27 v58.65,31.5
DDR_A3  (via drill 0.2 pad 0.46)  (1 unrouted)
  Top 0.121: U5.39 v59.44,29.9
  Route3 0.121: 67.74,27.43 68.43,27.43 68.83,27.05
  Route3 0.133: v59.44,29.9 60.33,29.9 60.45,29.77 60.45,28.63 60.58,28.5 60.83,28.5 60.96,28.63 60.96,29.77 61.09,29.9 63.17,29.9 63.25,29.82 63.25,29.59 63.17,29.52 62.48,29.52 62.41,29.44 62.41,29.21 62.48,29.13 63.17,29.13 63.25,29.06 63.25,28.83 63.17,28.75 62.48,28.75 62.41,28.68 62.41,28.47 62.48,28.4 62.66,28.4 62.74,28.32 62.74,27.94 62.81,27.86 63.04,27.86 63.12,27.94 63.12,28.32 63.2,28.4 63.55,28.4 63.63,28.47 63.63,30.71 63.7,30.79 63.93,30.79 64.01,30.71 64.01,27.61 64.14,27.48 67.69,27.48 67.74,27.43
DDR_A4  (via drill 0.2 pad 0.46)  (1 unrouted)
  Top 0.121: v64.26,22.53 64.64,22.91 64.64,23.29 61.85,26.09 61.85,26.85 61.09,27.61 61.09,28.8 60.81,29.08 60.48,29.08 60.25,29.34 60.25,29.9 U5.38
  Route3 0.121: 74.42,26.24 74.02,25.83 73.41,25.83
  Route3 0.133: 73.41,25.83 73.15,25.58 73.15,23.29 72.9,23.04 71.25,23.04 70.48,22.28 64.52,22.28 v64.26,22.53
DDR_A5  (via drill 0.2 pad 0.46)  (1 unrouted)
  Top 0.121: U5.19 60.86,29.49 61.47,28.88 61.47,28.5 61.59,28.37 v61.98,28.37
  Route3 0.121: 69.22,24.43 69.22,25.83 68.83,26.24
  Route3 0.133: v61.98,28.37 62.41,27.94 62.41,27.48 62.66,27.23 63.3,27.23 63.37,27.3 63.37,27.91 63.45,27.99 63.68,27.99 63.75,27.91 63.75,25.96 63.88,25.83 64.14,25.83 64.26,25.96 64.26,26.98 64.39,27.1 64.64,27.1 64.77,26.98 64.77,24.82 65.02,24.56 65.66,24.56 65.79,24.69 65.79,26.98 65.91,27.1 67.31,27.1 67.44,26.98 67.44,24.31 67.56,24.18 68.96,24.18 69.22,24.43
DDR_A6  (via drill 0.2 pad 0.46)  (1 unrouted)
  Top 0.121: U5.59 v57.84,30.68
  Bottom 0.121: 74.42,25.45 74.02,25.04 74.02,24.43 72.64,23.04 65.41,23.04 63.5,24.94 63.5,27.48 62.1,28.88 61.72,28.88 59.51,31.09 58.24,31.09 v57.84,30.68
DDR_A7  (via drill 0.2 pad 0.46)  (1 unrouted)
  Top 0.121: U5.74 60.25,32.28 62.26,32.28 62.48,32.05 62.48,31.42 63.75,30.15 63.75,25.96 65.53,24.18 66.29,24.18 66.42,24.31 66.42,25.58 66.29,25.7 65.76,25.7 v65.28,26.19
  Bottom 0.121: 68.83,25.45 U12.86 70.36,25.83 70.48,25.96 70.48,26.52 70.36,26.64 67.74,26.64 67.28,26.19 v65.28,26.19
DDR_A8  (via drill 0.2 pad 0.46)  (1 unrouted)
  Top 0.121: U5.58 v58.65,30.68
  Bottom 0.121: v58.65,30.68 59.41,30.68 60.07,30.02 60.07,27.58 60.33,27.33 62.74,27.33 63.12,26.95 63.12,24.82 65.28,22.66 72.77,22.66 74.42,24.31 74.42,24.64
DDR_A9  (via drill 0.2 pad 0.46)  (1 unrouted)
  Top 0.121: v61.98,27.74 61.98,27.23 62.1,27.1 62.26,27.1 62.38,27.23 62.38,28.73 62.23,28.88 61.92,28.88 61.21,29.59 61.21,29.72 U5.37
  Route3 0.133: v61.98,27.74 61.98,27.36 62.48,26.85 63.12,26.85 63.37,26.59 63.37,25.7 65.28,23.8 66.17,23.8 66.29,23.93 66.29,26.59 66.42,26.72 66.8,26.72 66.93,26.59 66.93,23.93 67.06,23.8 69.6,23.8 70.1,24.31 70.1,25.7 69.98,25.83 69.75,25.83 69.62,25.7 69.62,25.45
DDR_A10  (via drill 0.2 pad 0.46)  (1 unrouted)
  Top 0.121: U5.94 v58.65,32.28
  Route3 0.121: v58.65,32.28 59.05,32.69 59.82,32.69
  Route3 0.133: 59.82,32.69 60.33,33.2 60.33,34.59 60.71,34.98 63.88,34.98 64.95,33.91 65.84,33.91 67.44,32.31 70.48,32.31 72.52,30.28 73.79,30.28 73.91,30.15 73.91,29.9 73.79,29.77 72.9,29.77 72.77,29.64 72.77,29.39 72.9,29.26 73.79,29.26 73.91,29.13 73.91,28.93 73.64,28.65
DDR_A11  (via drill 0.2 pad 0.46)  (1 unrouted)
  Top 0.121: v61.98,33.1 60.25,33.1 U5.92
  Bottom 0.121: 73.64,25.45 73.15,25.45 72.9,25.2 72.9,24.43 72.26,23.8 65.66,23.8 64.26,25.2 64.26,29.52 64.01,29.77 62.74,29.77 61.47,31.04 61.47,32.59 v61.98,33.1
DDR_A12  (via drill 0.2 pad 0.46)  (1 unrouted)
  Top 0.121: U5.75 v59.44,31.5
  Route3 0.133: v59.44,31.5 59.51,31.42 62.23,31.42 62.48,31.67 62.48,32.05 62.23,32.31 61.34,32.31 61.09,32.56 61.09,33.96 61.34,34.21 63.25,34.21 64.77,32.69 66.04,32.69 67.69,31.04 69.34,31.04 69.6,31.29 70.36,31.29 72.01,29.64 72.01,28.65 73.64,27.05
DDR_A13  (via drill 0.2 pad 0.46)  (1 unrouted)
  Top 0.121: U5.129 v59.44,33.88
  Bottom 0.121: v59.44,33.88 62.05,33.88 62.48,33.45 62.48,30.53 62.87,30.15 64.39,30.15 64.64,29.9 64.64,25.32 65.79,24.18 71.5,24.18 71.63,24.31 71.63,24.51 71.5,24.64 69.62,24.64
DDR_A14  (via drill 0.2 pad 0.46)  (1 unrouted)
  Top 0.121: U5.130 v58.65,33.88
  Bottom 0.121: 73.64,24.64 72.42,23.42 65.53,23.42 63.88,25.07 63.88,28.12 61.09,30.91 61.09,33.07 60.68,33.48 59.03,33.48 58.65,33.86 v58.65,33.88
DDR_A15
  Top 0.121: U5.57 59.44,30.68 61.7,30.68 62.74,29.64 62.74,25.7 65.28,23.16 72.01,23.16 72.64,23.8 72.64,27.66 U12.70
DDR_BA0  (via drill 0.2 pad 0.46)  (1 unrouted)
  Top 0.121: U5.40 v58.65,29.9
  Route3 0.121: v58.65,29.9 58.37,29.9 58.24,29.77 58.24,28.75 | 59.05,28.75 59.05,30.02
  Route3 0.133: 58.24,28.75 58.24,27.74 58.37,27.61 58.55,27.61 58.67,27.74 58.67,28.12 58.8,28.25 59.05,28.25 59.18,28.12 59.18,27.74 59.31,27.61 59.56,27.61 59.69,27.74 59.69,28.5 59.56,28.63 59.18,28.63 59.05,28.75 | 59.05,30.02 59.05,30.18 59.18,30.3 62.61,30.3 63.63,31.29 63.63,31.93 63.73,32.03 63.91,32.03 64.39,31.55 64.39,28.25 64.77,27.86 67.31,27.86 67.69,28.25 68.71,28.25 68.83,28.12 68.83,27.84
DDR_BA1  (via drill 0.2 pad 0.46)  (1 unrouted)
  Top 0.121: U5.73 v61.98,31.88
  Route3 0.133: v61.98,31.88 60.76,31.88 60.45,32.18 60.45,32.56 60.71,32.82 60.71,34.34 60.96,34.59 63.5,34.59 65.05,33.05 66.19,33.05 67.82,31.42 69.22,31.42 69.34,31.55 69.34,31.8 69.47,31.93 70.23,31.93 72.36,29.79 72.36,28.91 73.18,28.09 73.79,28.09 73.94,27.94 73.94,27.51 74.42,27.05
DDR_BA2  (via drill 0.2 pad 0.46)  (1 unrouted)
  Top 0.121: U5.21 v59.44,29.08
  Route3 0.133: 69.62,27.84 70.1,27.84 70.23,27.96 70.23,28.37 70.36,28.5 70.61,28.5 70.87,28.25 70.87,27.86 70.61,27.61 70.61,27.36 70.87,27.1 70.87,23.8 70.1,23.04 65.02,23.04 62.61,25.45 62.61,25.7 60.83,27.48 60.63,27.48 60.5,27.36 60.5,27.1 60.38,26.98 60.2,26.98 60.07,27.1 60.07,29.26 59.94,29.39 59.74,29.39 v59.44,29.08
DDR_CASN  (via drill 0.2 pad 0.46)
  Top 0.121: U5.91 62.61,32.69 62.87,32.44 62.87,31.67 63.5,31.04 64.01,31.04 64.14,30.91 64.14,26.09 64.26,25.96 64.64,25.96 64.77,26.09 64.77,27.48 64.9,27.61 65.56,27.61 65.68,27.48 65.68,26.21 65.81,26.09 66.29,26.09 66.42,26.21 66.42,26.47 66.29,26.59 66.17,26.59 66.04,26.72 66.04,26.98 66.17,27.1 66.29,27.1 66.42,27.23 66.42,27.74 66.29,27.86 65.41,27.86 65.28,27.99 v65.28,28.75 | v69.62,29.44 U12.57
  Route3 0.133: v65.28,28.75 67.18,28.75 67.44,29.01 69.19,29.01 v69.62,29.44
DDR_CKE  (via drill 0.2 pad 0.46)  (2 unrouted)
  Top 0.121: U5.111 v59.44,33.1
  Route3 0.133: v59.44,33.1 59.94,33.58 59.94,35.1 59.82,35.23 59.31,35.23 59.18,35.36 59.18,35.61 59.31,35.74 60.96,35.74 61.34,35.36 64.01,35.36 65.15,34.21 66.04,34.21 67.56,32.69 70.74,32.69 72.77,30.66 75.31,30.66 75.44,30.53 75.44,29.64 75.23,29.44
  Bottom 0.121: 75.23,29.44 R96.2
DDR_CLK
  Top 0.095: U5.56 60.1,31.09 60.48,31.47 61.92,31.47 63.4,30 63.4,25.96 65.53,23.8 69.7,23.8 71.88,25.98 71.88,29.49 72.87,30.48 73.05,30.48 U12.52
DDR_CLKN
  Top 0.095: U5.55 60.76,31.19 61.8,31.19 63.12,29.9 63.12,25.83 65.43,23.52 69.83,23.52 72.16,25.86 72.16,29.39 72.97,30.2 73.51,30.2 73.61,30.1 73.61,29.95 73.51,29.84 U12.58
DDR_CSN
  Top 0.121: U12.62 68.83,28.63 67.77,28.63 67.69,28.7 67.69,29.06 67.61,29.13 67.39,29.13 67.31,29.06 67.31,28.5 67.56,28.25 67.56,24.69 67.44,24.56 67.31,24.56 67.18,24.69 67.18,28.12 66.93,28.37 66.93,29.57 67,29.64 67.49,29.64 67.56,29.72 67.56,31.04 65.96,32.64 64.82,32.64 62.76,34.7 60.25,34.7 U5.128
DDR_D0  (via drill 0.2 pad 0.46)  (1 unrouted)